# EAGLE board SparkFun_MicroMod_Function_ADIN1110-Panel_v12 (EAGLE 9.6.2), part 1 of 3
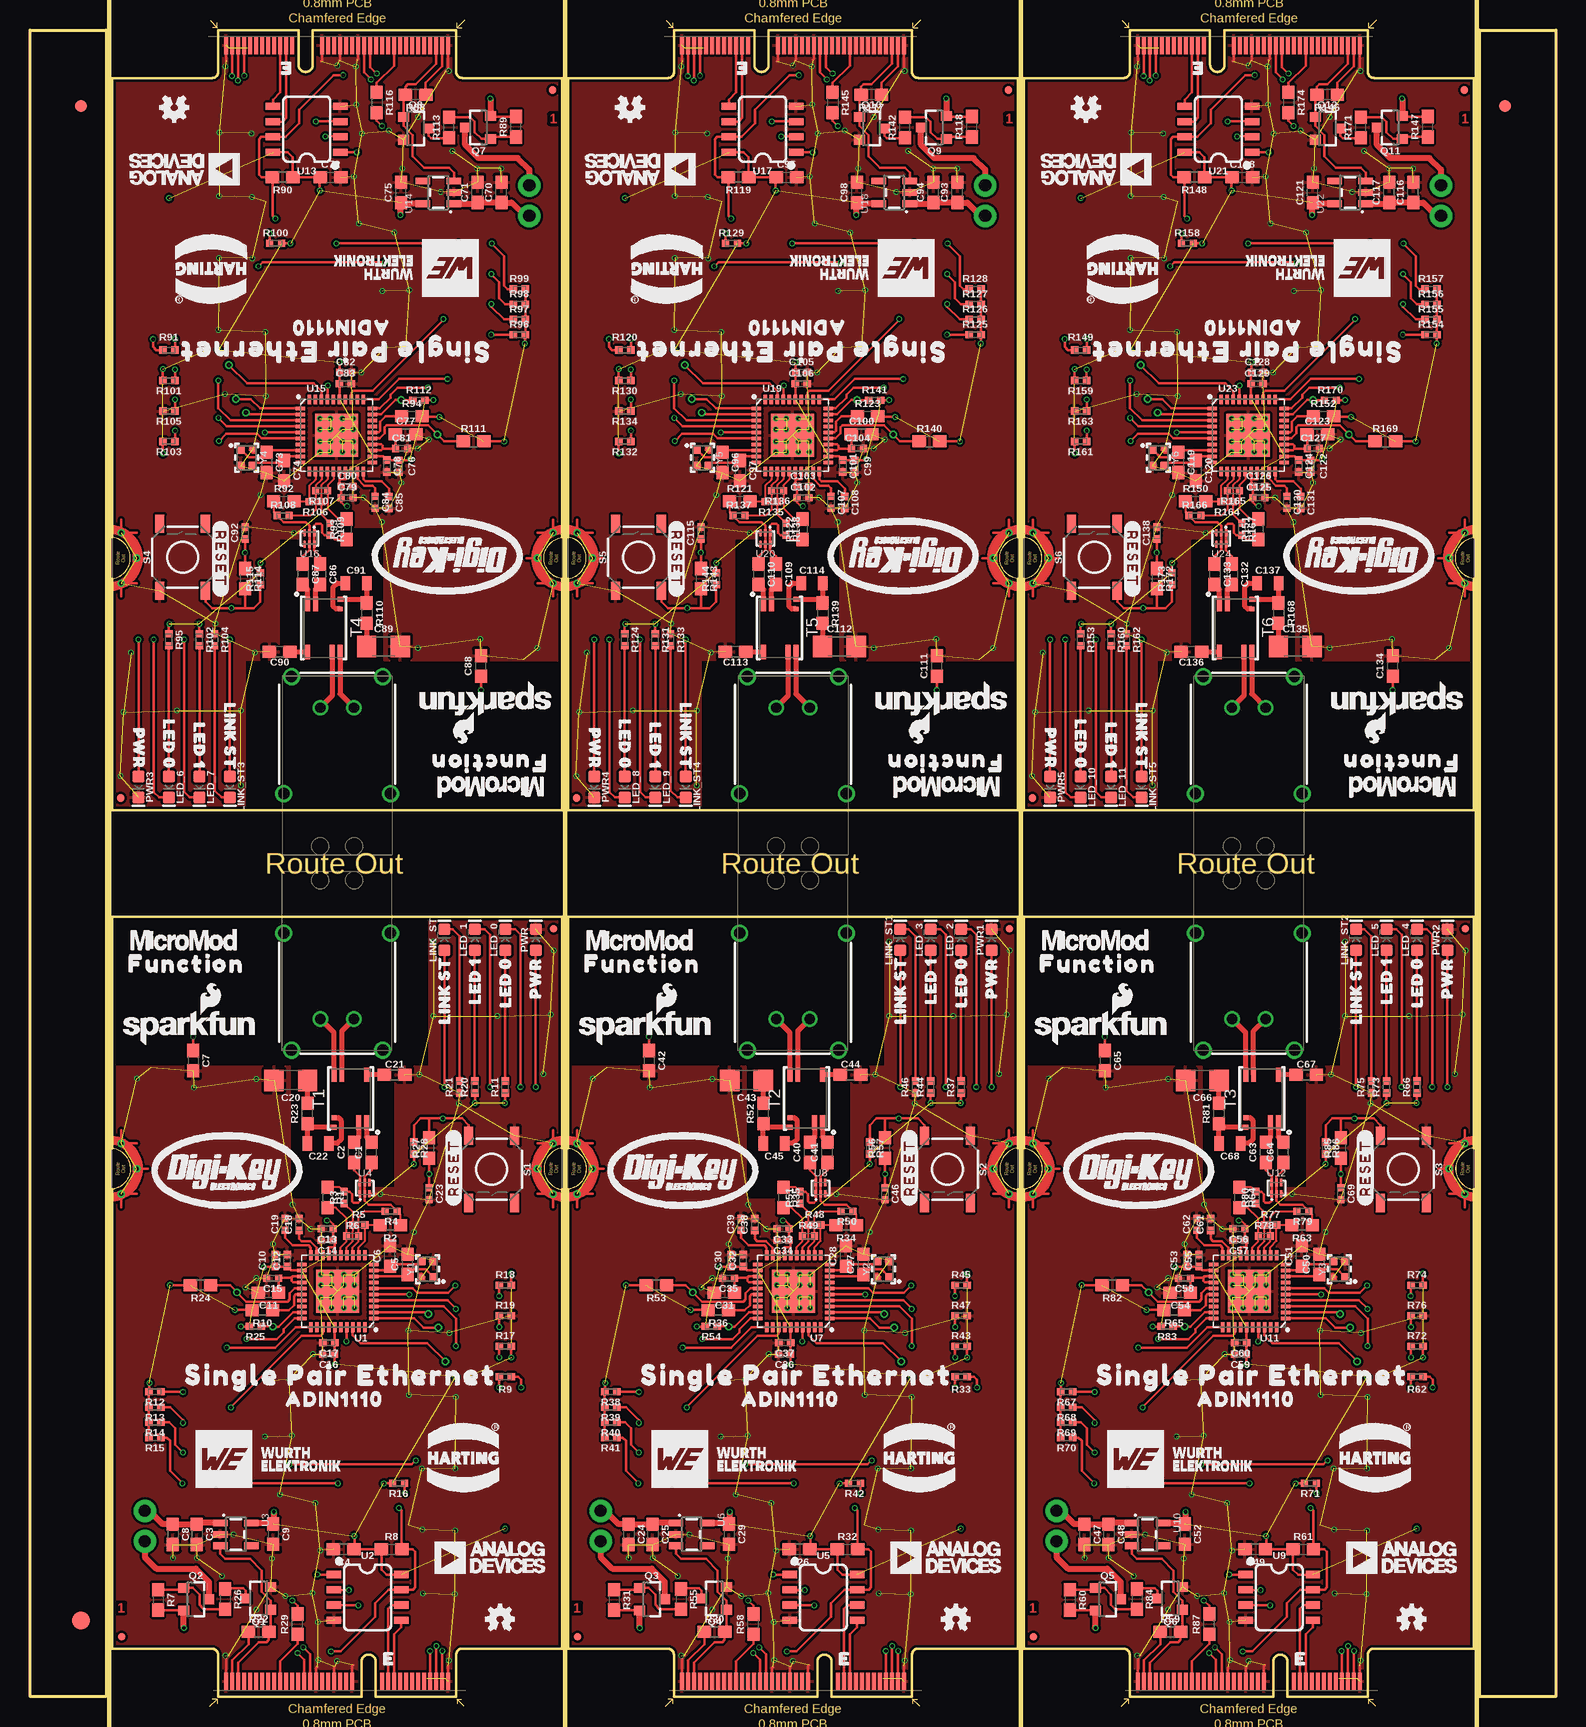
[diagram p0: board, top side]
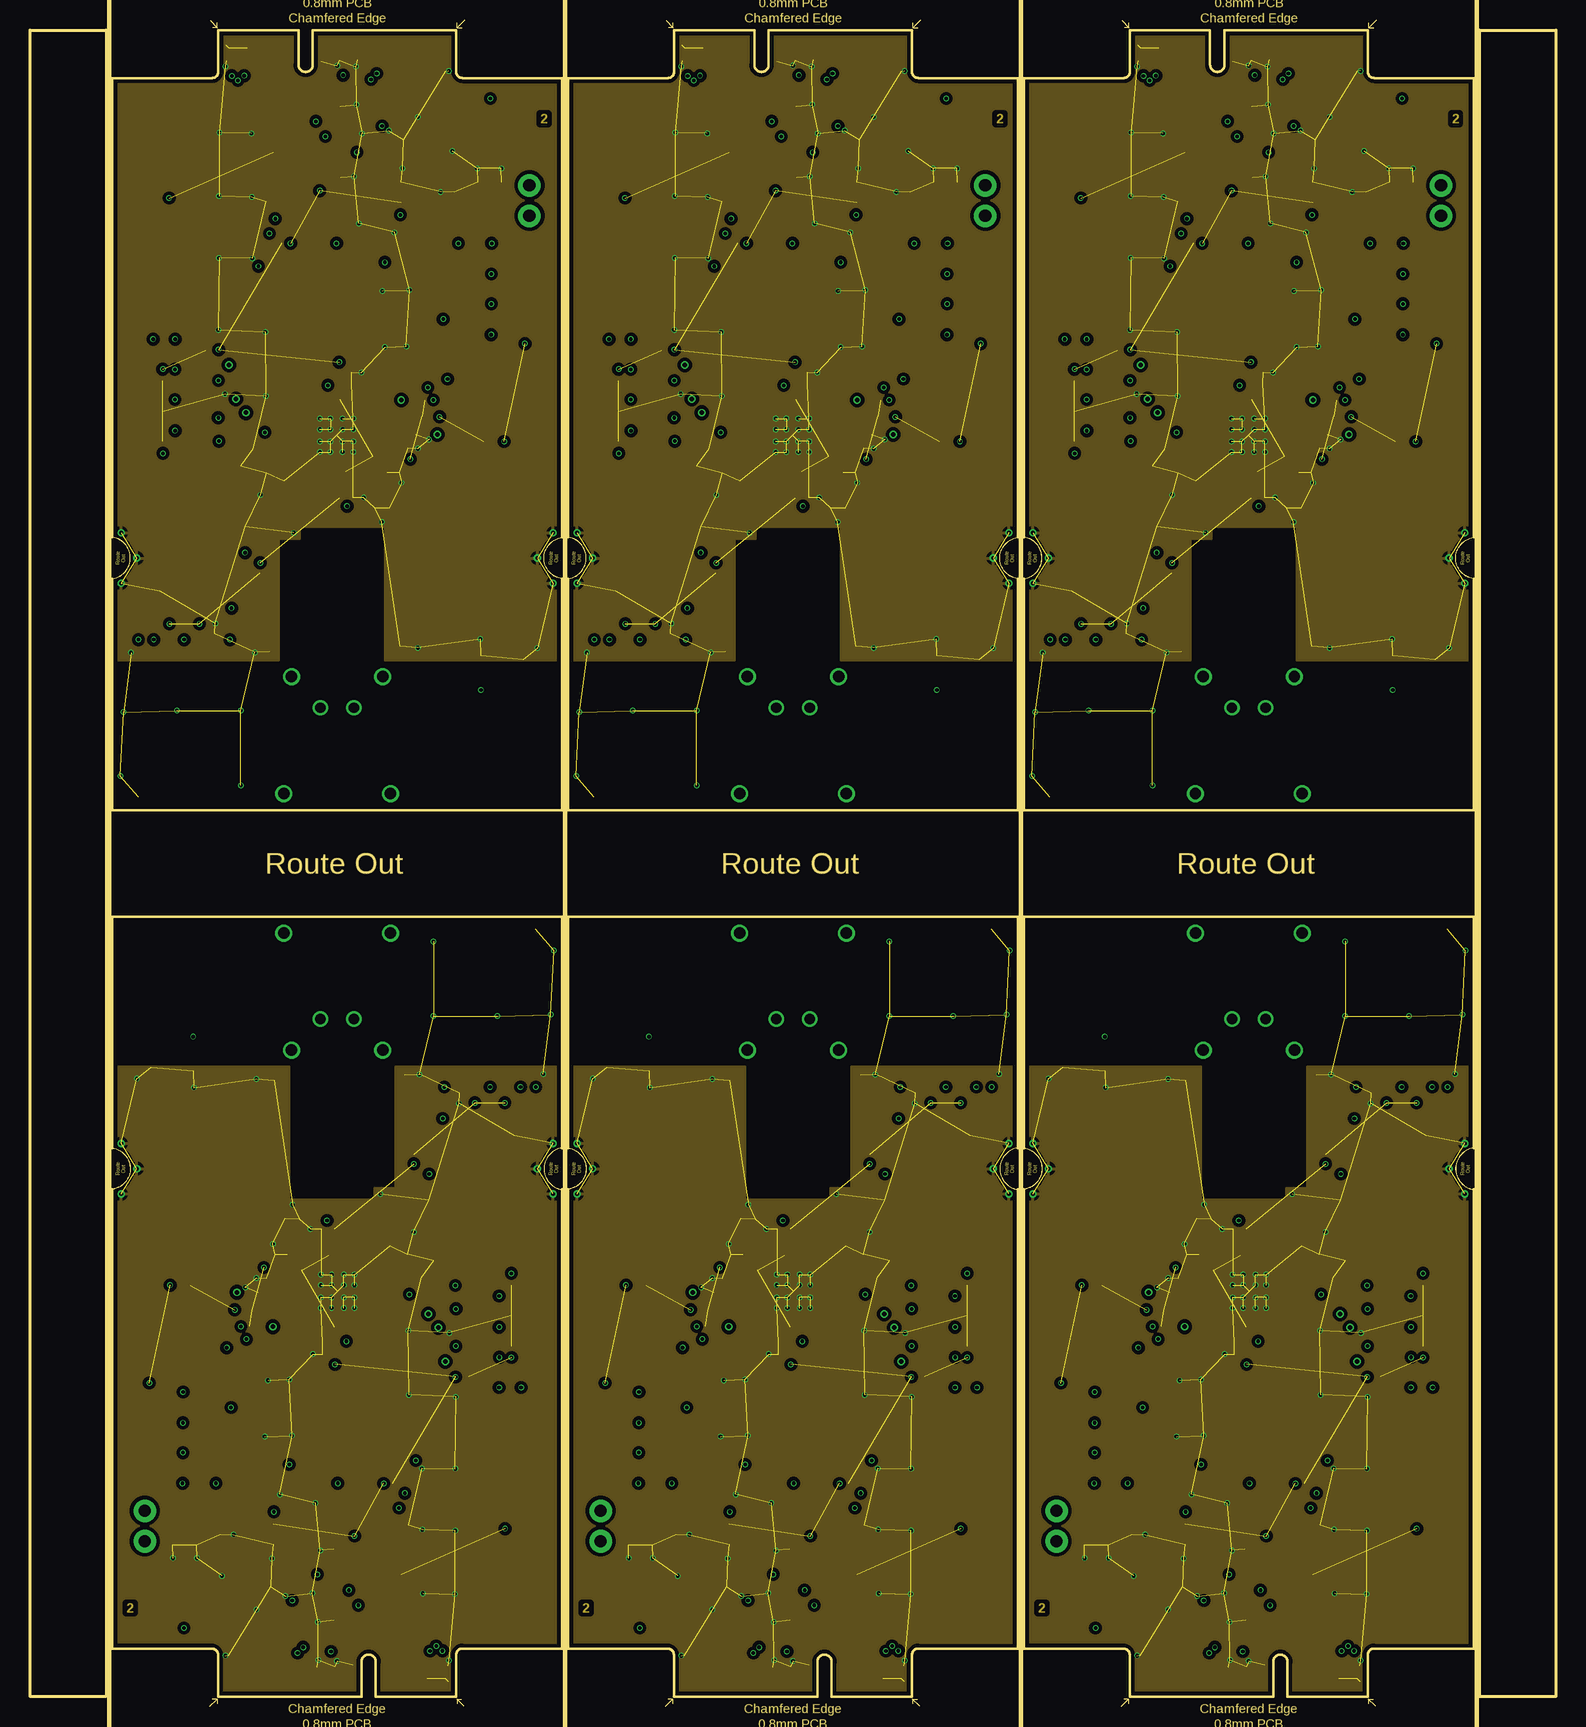
[diagram p1: board, inner layer Route2]
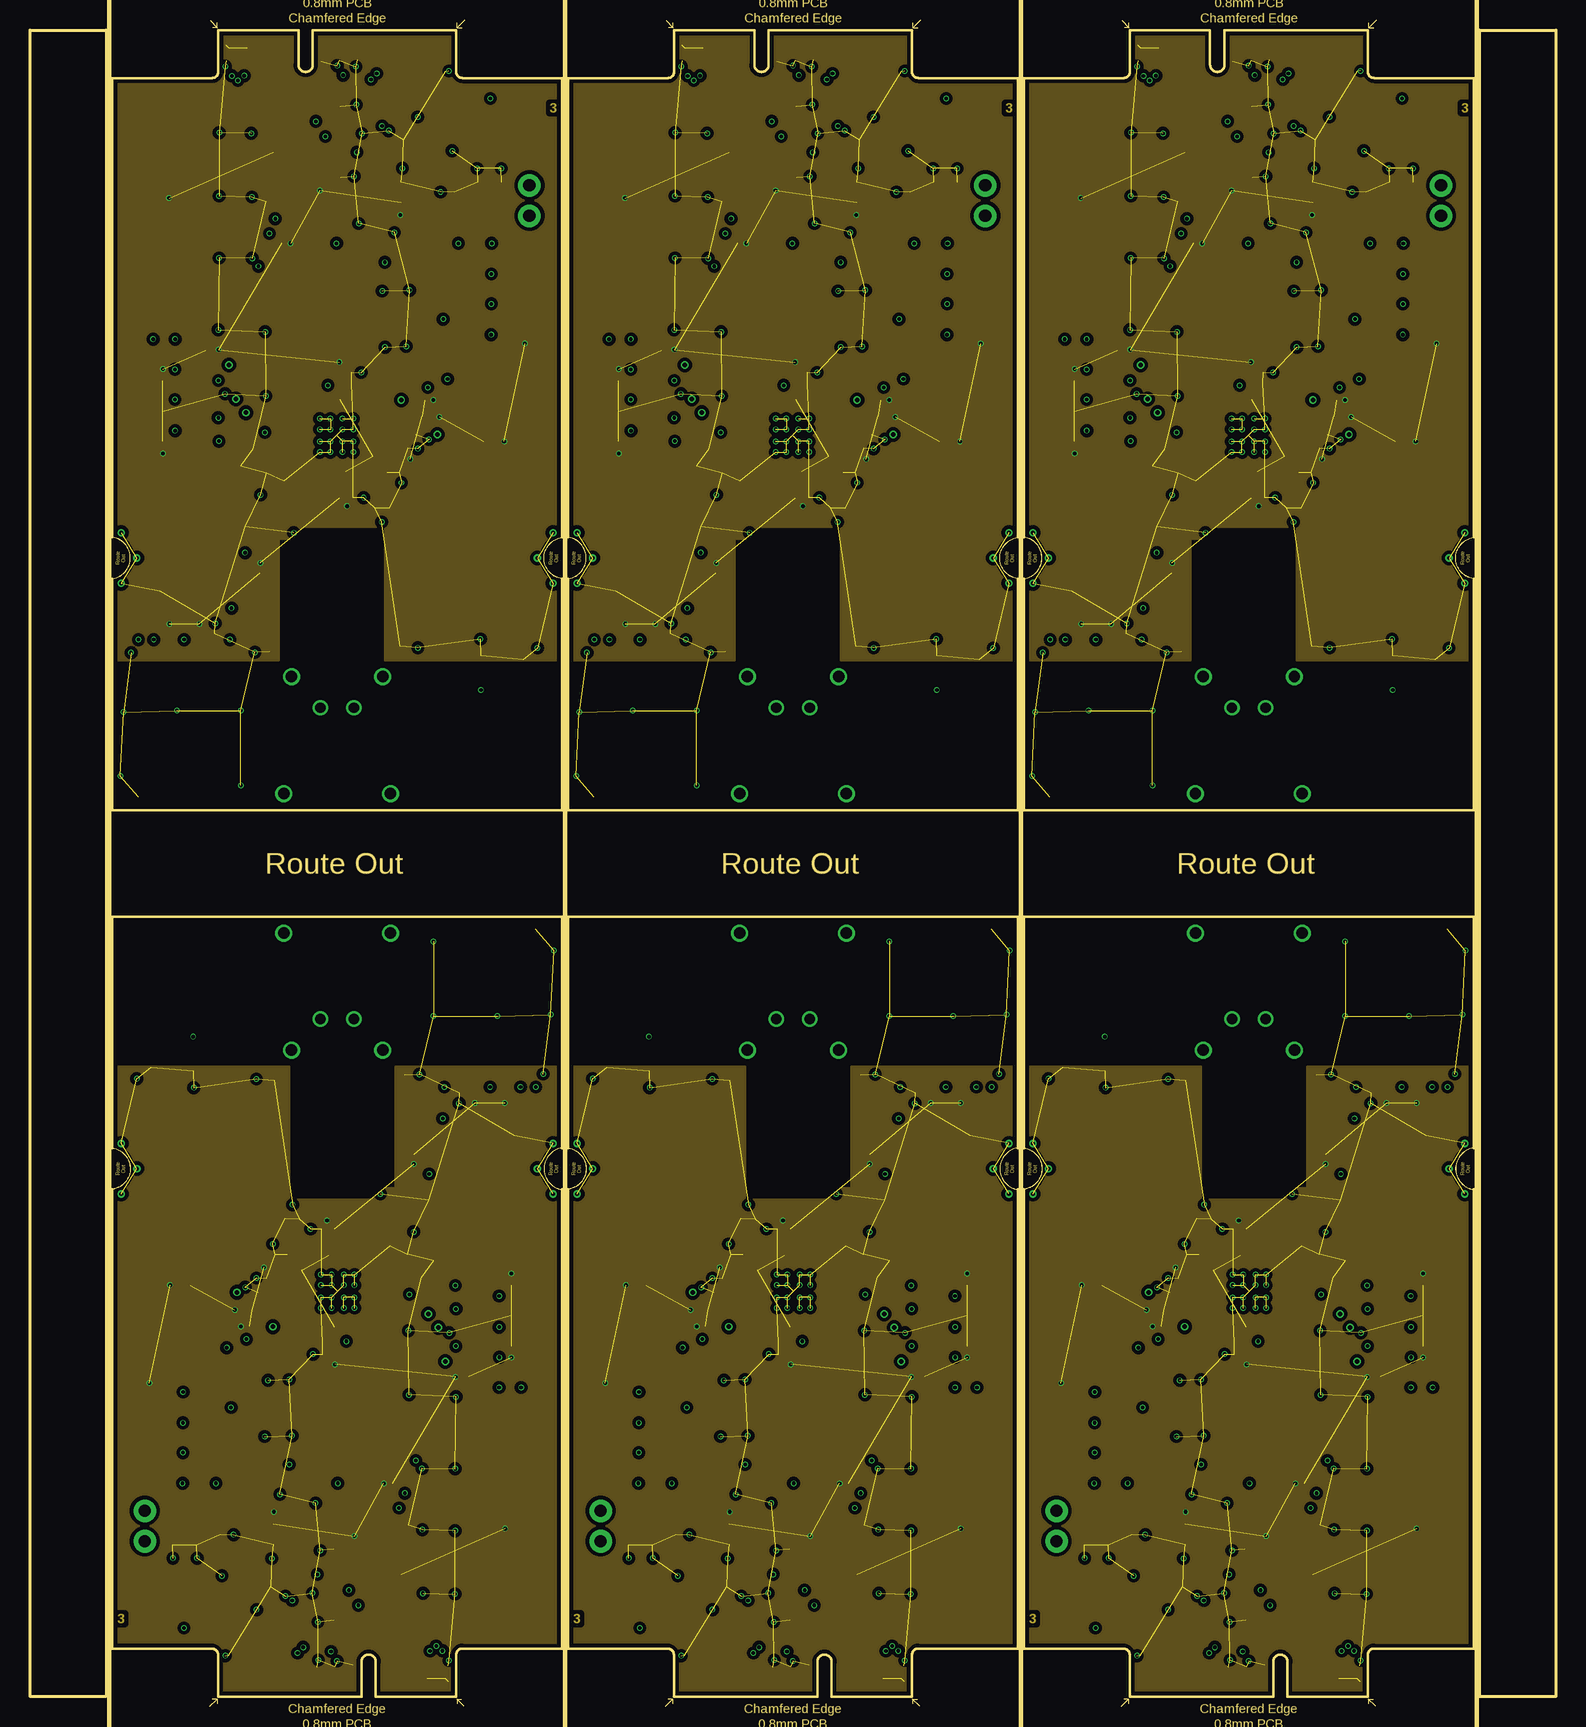
[diagram p2: board, inner layer Route15]
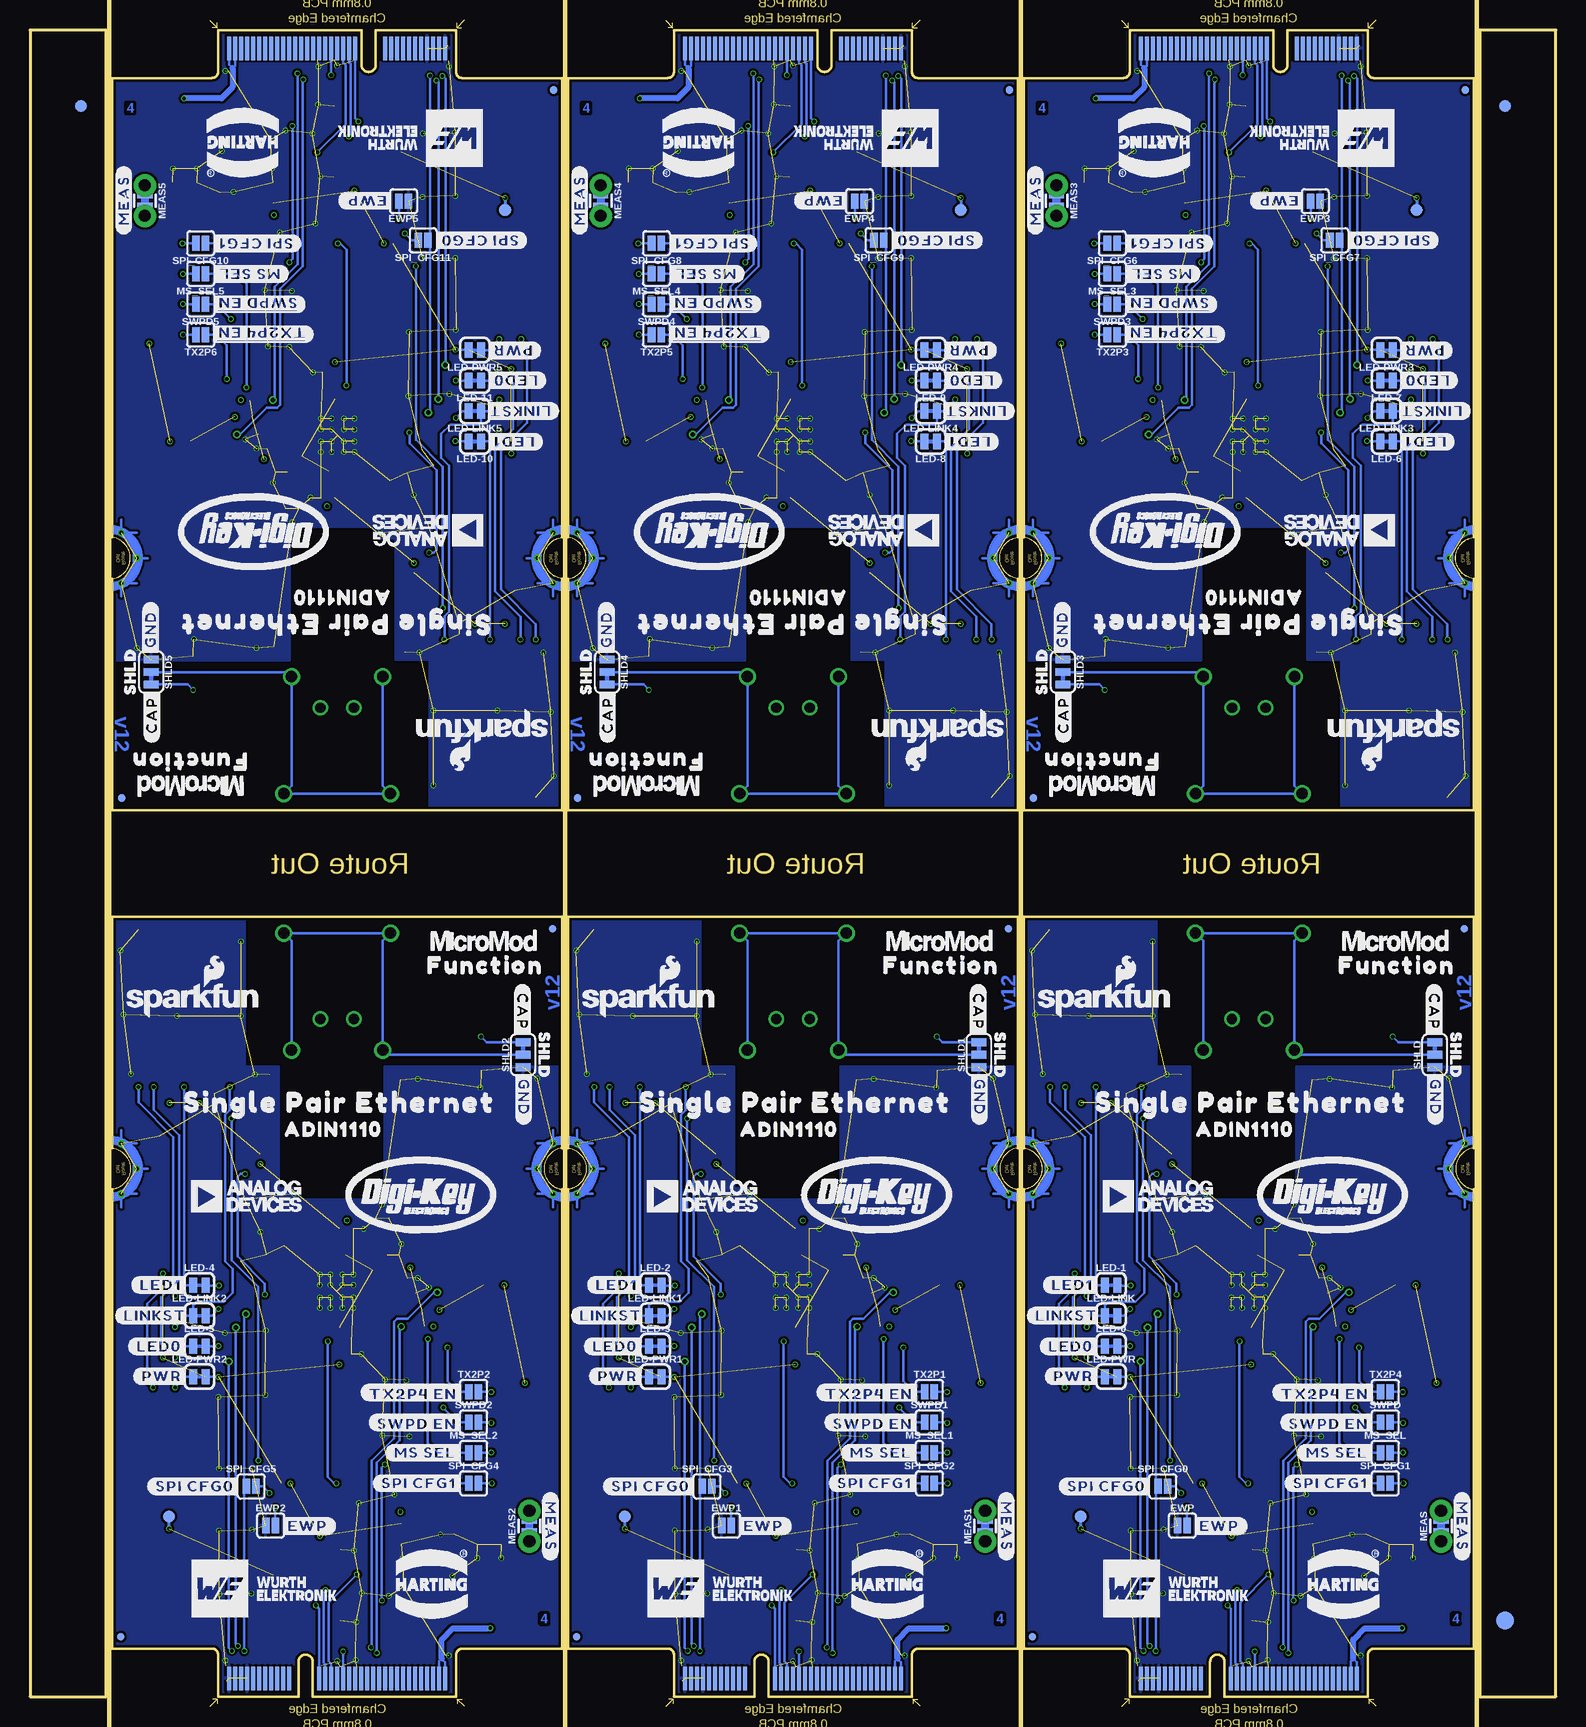
[diagram p3: board, bottom side, seen from below]

Size 127.2 x 138.89 mm. Coordinates in mm from the lower left corner, seen from the top.
Outline: 35.53,0 28.83,0 28.83,2.9 arc180 27.63,2.9 27.63,0 15.68,0 15.68,3.5 arc90 15.15,4 6.86,4 6.86,42.29 arc165 6.86,45.72 6.86,65 44.35,65 44.35,45.72 arc165 44.35,42.27 44.35,4 36,4 arc90 35.53,3.5 35.53,0
Outline: 73.53,0 66.83,0 66.83,2.9 arc180 65.63,2.9 65.63,0 53.68,0 53.68,3.5 arc90 53.15,4 44.86,4 44.86,42.29 arc165 44.86,45.72 44.86,65 82.35,65 82.35,45.72 arc165 82.35,42.27 82.35,4 74,4 arc90 73.53,3.5 73.53,0
Outline: 111.53,0 104.83,0 104.83,2.9 arc180 103.63,2.9 103.63,0 91.68,0 91.68,3.5 arc90 91.15,4 82.86,4 82.86,42.29 arc165 82.86,45.72 82.86,65 120.34,65 120.34,45.72 arc165 120.34,42.27 120.34,4 112,4 arc90 111.53,3.5 111.53,0
Outline: 15.68,138.89 22.38,138.89 22.38,135.99 arc180 23.58,135.99 23.58,138.89 35.53,138.89 35.53,135.39 arc90 36.05,134.89 44.35,134.89 44.35,96.6 arc165 44.35,93.17 44.35,73.89 6.86,73.89 6.86,93.17 arc165 6.86,96.62 6.86,134.89 15.2,134.89 arc90 15.68,135.39 15.68,138.89
Outline: 53.68,138.89 60.38,138.89 60.38,135.99 arc180 61.58,135.99 61.58,138.89 73.53,138.89 73.53,135.39 arc90 74.05,134.89 82.35,134.89 82.35,96.6 arc165 82.35,93.17 82.35,73.89 44.86,73.89 44.86,93.17 arc165 44.86,96.62 44.86,134.89 53.2,134.89 arc90 53.68,135.39 53.68,138.89
Outline: 91.67,138.89 98.37,138.89 98.37,135.99 arc180 99.57,135.99 99.57,138.89 111.52,138.89 111.52,135.39 arc90 112.05,134.89 120.34,134.89 120.34,96.6 arc165 120.34,93.17 120.34,73.89 82.86,73.89 82.86,93.17 arc165 82.86,96.62 82.86,134.89 91.2,134.89 arc90 91.67,135.39 91.67,138.89
Outline: 120.85,138.89 127.2,138.89 127.2,0 120.85,0 120.85,138.89
Outline: 0,138.89 6.35,138.89 6.35,0 0,0 0,138.89
Copper layers (1+2*15+16): Top 0.035mm / dielectric 1.5mm / Route2 0.035mm / dielectric 0.15mm / Route15 0.035mm / dielectric 0.2mm / Bottom 0.035mm
Design rules "SparkFun_MicroMod_Function_ADIN1110": minimum track width 4mil, minimum drill 0.2mm, track to track 4mil, track to pad 4mil, pad to pad 4mil, via to via 4mil, smd to smd 4mil, copper to edge 6mil, drill to drill 6mil, minimum pad ring 3mil, minimum via ring 3mil, stop-mask expansion 2.5mil, vias tented up to drill 25mil, thermal gap 10mil
Net classes: 0 default: width 0 mm, drill 0 mm
Milling: 4 lines

## Footprints (pad centres in the part's own frame; a part is rotated, then mirrored left to right if it is on the bottom)
0603 = smd 1.1 x 1: 1 -0.85,0; 2 0.85,0
0402-TIGHT = smd 0.6 x 0.6: 1 -0.5,0; 2 0.5,0
1206 = smd 1.6 x 1.8: 1 -1.4,0; 2 1.4,0
0805 = smd 0.8 x 1.2: 1 -0.9,0; 2 0.9,0
TP_15TH = drill 0.381 pad 0.61: 1 0,0
FIDUCIAL-1X2 = smd 1 x 1: 1 0,0
FIDUCIAL-1.5X3 = smd 1.5 x 1.5: 1 0,0
SMT-JUMPER_2_NO_SILK = smd 0.635 x 1.27: 1 -0.406,0; 2 0.406,0
FIDUCIAL-MICRO = smd 0.635 x 0.635: 1 0,0
T1_INDUSTRIAL_JACK_AH_IP20 = drill 0.85 pad 1.25: 1 1.4,8.52; 2 -1.4,8.52 | drill 0.95 pad 1.35: S1 -3.8,11.12; S2 3.8,11.12; S3 4.45,1.37; S4 -4.45,1.37
M.2-CARD-E-22_FUNCTION_STANDARD = smd 0.35 x 1.45: 1 9.25,1.275; 3 8.75,1.275; 5 8.25,1.275; 7 7.75,1.275; 9 7.25,1.275; 11 6.75,1.275; 13 6.25,1.275; 15 5.75,1.275; 17 5.25,1.275; 19 4.75,1.275; 21 4.25,1.275; 23 3.75,1.275; 33 1.25,1.275; 35 0.75,1.275; 37 0.25,1.275; 39 -0.25,1.275; 41 -0.75,1.275; 43 -1.25,1.275; 45 -1.75,1.275; 47 -2.25,1.275; 49 -2.75,1.275; 51 -3.25,1.275; 53 -3.75,1.275; 55 -4.25,1.275; 57 -4.75,1.275; 59 -5.25,1.275; 61 -5.75,1.275; 63 -6.25,1.275; 65 -6.75,1.275; 67 -7.25,1.275; 69 -7.75,1.275; 71 -8.25,1.275; 73 -8.75,1.275; 75 -9.25,1.275 | smd 0.35 x 1.95 bottom: 2 9,1.525; 4 8.5,1.525; 6 8,1.525; 8 7.5,1.525; 10 7,1.525; 12 6.5,1.525; 14 6,1.525; 16 5.5,1.525; 18 5,1.525; 20 4.5,1.525; 22 4,1.525; 32 1.5,1.525; 34 1,1.525; 36 0.5,1.525; 38 0,1.525; 40 -0.5,1.525; 42 -1,1.525; 44 -1.5,1.525; 46 -2,1.525; 48 -2.5,1.525; 50 -3,1.525; 52 -3.5,1.525; 54 -4,1.525; 56 -4.5,1.525; 58 -5,1.525; 60 -5.5,1.525; 62 -6,1.525; 64 -6.5,1.525; 66 -7,1.525; 68 -7.5,1.525; 70 -8,1.525; 72 -8.5,1.525; 74 -9,1.525 | drill 0.305 pad 0.61: GND1 -18,41.9; GND2 -16.7,44; GND3 -18,46.1; GND4 18,41.9; GND5 16.7,44; GND6 18,46.1
SMT-JUMPER_2_NC_TRACE_SILK = smd 0.66 x 1.27: 1 -0.521,0; 2 0.521,0
LED-0603 = smd 1 x 1: A -0.877,0; C 0.877,0
COMBO-JUMPER_2_NC_TRACE = smd 0.635 x 1.27: 1 -0.508,0; 2 0.508,0 | drill 1.016 pad 1.88: 3 -1.27,0; 4 1.27,0
SOT23-3 = smd 0.8 x 0.9: 1 -0.95,-1; 2 0.95,-1; 3 0,1.1
TACTILE_SWITCH_SMD_5.2MM = smd 1.524 x 0.762: 1 -2.794,1.905; 2 2.794,1.905; 3 -2.794,-1.905; 4 2.794,-1.905
SMT-JUMPER_3_1-NC_TRACE_SILK = smd 0.66 x 1.27: 1 -1.041,0; 2 0,0; 3 1.041,0
WE_STST_TRANSFORMER_1:1_SMD_3.2X4.7MM_74930030 = smd 1.2 x 0.41: 1 -1.99,-1.35; 2 -1.99,-0.7; 5 1.99,-1.35; 6 1.99,0.7; 7 1.99,1.35 | smd 0.4 x 0.41: 3 -2.39,1.35; 4 -1.59,1.35
PAD.03X.04 = smd 1.016 x 1.016: 1 0,0
LFCSP-40 = smd 0.8 x 0.285: 1 -3,2.25; 2 -3,1.75; 3 -3,1.25; 4 -3,0.75; 5 -3,0.25; 6 -3,-0.25; 7 -3,-0.75; 8 -3,-1.25; 9 -3,-1.75; 10 -3,-2.25; 21 3,-2.25; 22 3,-1.75; 23 3,-1.25; 24 3,-0.75; 25 3,-0.25; 26 3,0.25; 27 3,0.75; 28 3,1.25; 29 3,1.75; 30 3,2.25 | smd 0.285 x 0.8: 11 -2.25,-3; 12 -1.75,-3; 13 -1.25,-3; 14 -0.75,-3; 15 -0.25,-3; 16 0.25,-3; 17 0.75,-3; 18 1.25,-3; 19 1.75,-3; 20 2.25,-3; 31 2.25,3; 32 1.75,3; 33 1.25,3; 34 0.75,3; 35 0.25,3; 36 -0.25,3; 37 -0.75,3; 38 -1.25,3; 39 -1.75,3; 40 -2.25,3 | smd 3.6 x 3.6: EP 0,0
SO08 = smd 0.6 x 1.2: 1 -1.905,-2.8; 2 -0.635,-2.8; 3 0.635,-2.8; 4 1.905,-2.8; 5 1.905,2.8; 6 0.635,2.8; 7 -0.635,2.8; 8 -1.905,2.8
SOT23-5 = smd 0.55 x 1.2: 1 -0.95,-1.3; 2 0,-1.3; 3 0.95,-1.3; 4 0.95,1.3; 5 -0.95,1.3
WE_TVS_1.0X1.2MM = smd 0.2 x 0.6: 1 -0.4,-0.475; 2 0,-0.475; 3 0.4,-0.475; 4 0.4,0.475; 5 0,0.475; 6 -0.4,0.475
CRYSTAL-SMD-2.0X1.6MM-WE = smd 0.75 x 0.7: 1 -0.675,-0.5; 2 0.675,-0.5; 3 0.675,0.5 | smd 0.381 x 0.381: 4 -0.675,0.5

## Placement (x,y rotation side)
C1  0.22uF  [0603]  28.47,45.36 90 top
C2  0.22uF  [0603]  27.01,45.36 90 top
C3  0.1uF  [0603]  13.9,13.53 270 top
C4  0.1uF  [0603]  26.14,12.27 180 top
C5  10pF  [0603]  31.48,36.03 90 top
C6  10pF  [0603]  30.01,36.72 90 top
C7  3.3nF  [0603]  13.6,53 270 top
C8  1.0uF  [0603]  11.9,13.53 270 top
C9  1.0uF  [0603]  20.27,13.54 270 top
C10  0.1uF  [0402-TIGHT]  20.44,36.35 90 top
C11  0.68uF  [0603]  19.89,33.67 180 top
C12  10nF  [0402-TIGHT]  21.45,36.34 90 top
C13  0.1uF  [0402-TIGHT]  24.77,38.99 180 top
C14  10nF  [0402-TIGHT]  24.78,38.03 180 top
C15  0.1uF  [0402-TIGHT]  20.23,34.87 180 top
C16  0.1uF  [0402-TIGHT]  24.9,28.53 180 top
C17  10nF  [0402-TIGHT]  24.91,29.49 180 top
C18  0.1uF  [0402-TIGHT]  22.43,39.35 90 top
C19  1.0uF  [0402-TIGHT]  21.28,39.37 90 top
C20  1.0nF/2kV  [1206]  21.73,51.36 180 top
C21  0.1uF/50V  [0603]  30.39,51.82 0 top
C22  470nF/100V  [0805]  24.03,46.1 180 top
C23  0.1uF  [0402-TIGHT]  33.27,41.91 270 top
C24  1.0uF  [0603]  49.9,13.53 270 top
C25  0.1uF  [0603]  51.9,13.53 270 top
C26  0.1uF  [0603]  64.14,12.27 180 top
C27  10pF  [0603]  69.48,36.03 90 top
C28  10pF  [0603]  68.01,36.72 90 top
C29  1.0uF  [0603]  58.27,13.54 270 top
C30  0.1uF  [0402-TIGHT]  58.44,36.35 90 top
C31  0.68uF  [0603]  57.89,33.67 180 top
C32  10nF  [0402-TIGHT]  59.45,36.34 90 top
C33  0.1uF  [0402-TIGHT]  62.76,38.99 180 top
C34  10nF  [0402-TIGHT]  62.77,38.03 180 top
C35  0.1uF  [0402-TIGHT]  58.23,34.87 180 top
C36  0.1uF  [0402-TIGHT]  62.9,28.53 180 top
C37  10nF  [0402-TIGHT]  62.91,29.49 180 top
C38  0.1uF  [0402-TIGHT]  60.42,39.35 90 top
C39  1.0uF  [0402-TIGHT]  59.28,39.37 90 top
C40  0.22uF  [0603]  65.01,45.36 90 top
C41  0.22uF  [0603]  66.46,45.36 90 top
C42  3.3nF  [0603]  51.6,53 270 top
C43  1.0nF/2kV  [1206]  59.73,51.36 180 top
C44  0.1uF/50V  [0603]  68.39,51.82 0 top
C45  470nF/100V  [0805]  62.02,46.1 180 top
C46  0.1uF  [0402-TIGHT]  71.27,41.91 270 top
C47  1.0uF  [0603]  87.9,13.53 270 top
C48  0.1uF  [0603]  89.9,13.53 270 top
C49  0.1uF  [0603]  102.14,12.27 180 top
C50  10pF  [0603]  107.48,36.03 90 top
C51  10pF  [0603]  106.01,36.72 90 top
C52  1.0uF  [0603]  96.27,13.54 270 top
C53  0.1uF  [0402-TIGHT]  96.43,36.35 90 top
C54  0.68uF  [0603]  95.89,33.67 180 top
C55  10nF  [0402-TIGHT]  97.45,36.34 90 top
C56  0.1uF  [0402-TIGHT]  100.76,38.99 180 top
C57  10nF  [0402-TIGHT]  100.77,38.03 180 top
C58  0.1uF  [0402-TIGHT]  96.23,34.87 180 top
C59  0.1uF  [0402-TIGHT]  100.89,28.53 180 top
C60  10nF  [0402-TIGHT]  100.91,29.49 180 top
C61  0.1uF  [0402-TIGHT]  98.42,39.35 90 top
C62  1.0uF  [0402-TIGHT]  97.28,39.37 90 top
C63  0.22uF  [0603]  103,45.36 90 top
C64  0.22uF  [0603]  104.46,45.36 90 top
C65  3.3nF  [0603]  89.6,53 270 top
C66  1.0nF/2kV  [1206]  97.73,51.36 180 top
C67  0.1uF/50V  [0603]  106.39,51.82 0 top
C68  470nF/100V  [0805]  100.02,46.1 180 top
C69  0.1uF  [0402-TIGHT]  109.27,41.91 270 top
C70  1.0uF  [0603]  39.3,125.36 90 top
C71  0.1uF  [0603]  37.3,125.36 90 top
C72  0.1uF  [0603]  25.06,126.62 0 top
C73  10pF  [0603]  19.73,102.86 270 top
C74  10pF  [0603]  21.2,102.17 270 top
C75  1.0uF  [0603]  30.93,125.35 90 top
C76  0.1uF  [0402-TIGHT]  30.77,102.54 270 top
C77  0.68uF  [0603]  31.32,105.22 0 top
C78  10nF  [0402-TIGHT]  29.75,102.55 270 top
C79  0.1uF  [0402-TIGHT]  26.44,99.9 0 top
C80  10nF  [0402-TIGHT]  26.43,100.86 0 top
C81  0.1uF  [0402-TIGHT]  30.97,104.02 0 top
C82  0.1uF  [0402-TIGHT]  26.31,110.36 0 top
C83  10nF  [0402-TIGHT]  26.29,109.4 0 top
C84  0.1uF  [0402-TIGHT]  28.78,99.54 270 top
C85  1.0uF  [0402-TIGHT]  29.92,99.52 270 top
C86  0.22uF  [0603]  24.2,93.53 270 top
C87  0.22uF  [0603]  22.74,93.53 270 top
C88  3.3nF  [0603]  37.6,85.89 90 top
C89  1.0nF/2kV  [1206]  29.47,87.53 0 top
C90  0.1uF/50V  [0603]  20.81,87.07 180 top
C91  470nF/100V  [0805]  27.18,92.79 0 top
C92  0.1uF  [0402-TIGHT]  17.93,96.98 90 top
C93  1.0uF  [0603]  77.3,125.36 90 top
C94  0.1uF  [0603]  75.3,125.36 90 top
C95  0.1uF  [0603]  63.06,126.62 0 top
C96  10pF  [0603]  57.73,102.86 270 top
C97  10pF  [0603]  59.19,102.17 270 top
C98  1.0uF  [0603]  68.93,125.35 90 top
C99  0.1uF  [0402-TIGHT]  68.77,102.54 270 top
C100  0.68uF  [0603]  69.31,105.22 0 top
C101  10nF  [0402-TIGHT]  67.75,102.55 270 top
C102  0.1uF  [0402-TIGHT]  64.44,99.9 0 top
C103  10nF  [0402-TIGHT]  64.43,100.86 0 top
C104  0.1uF  [0402-TIGHT]  68.97,104.02 0 top
C105  0.1uF  [0402-TIGHT]  64.31,110.36 0 top
C106  10nF  [0402-TIGHT]  64.29,109.4 0 top
C107  0.1uF  [0402-TIGHT]  66.78,99.54 270 top
C108  1.0uF  [0402-TIGHT]  67.92,99.52 270 top
C109  0.22uF  [0603]  62.2,93.53 270 top
C110  0.22uF  [0603]  60.74,93.53 270 top
C111  3.3nF  [0603]  75.6,85.89 90 top
C112  1.0nF/2kV  [1206]  67.47,87.53 0 top
C113  0.1uF/50V  [0603]  58.81,87.07 180 top
C114  470nF/100V  [0805]  65.18,92.79 0 top
C115  0.1uF  [0402-TIGHT]  55.93,96.98 90 top
C116  1.0uF  [0603]  115.3,125.36 90 top
C117  0.1uF  [0603]  113.3,125.36 90 top
C118  0.1uF  [0603]  101.06,126.62 0 top
C119  10pF  [0603]  95.72,102.86 270 top
C120  10pF  [0603]  97.19,102.17 270 top
C121  1.0uF  [0603]  106.93,125.35 90 top
C122  0.1uF  [0402-TIGHT]  106.77,102.54 270 top
C123  0.68uF  [0603]  107.31,105.22 0 top
C124  10nF  [0402-TIGHT]  105.75,102.55 270 top
C125  0.1uF  [0402-TIGHT]  102.44,99.9 0 top
C126  10nF  [0402-TIGHT]  102.43,100.86 0 top
C127  0.1uF  [0402-TIGHT]  106.97,104.02 0 top
C128  0.1uF  [0402-TIGHT]  102.31,110.36 0 top
C129  10nF  [0402-TIGHT]  102.29,109.4 0 top
C130  0.1uF  [0402-TIGHT]  104.78,99.54 270 top
C131  1.0uF  [0402-TIGHT]  105.92,99.52 270 top
C132  0.22uF  [0603]  100.2,93.53 270 top
C133  0.22uF  [0603]  98.74,93.53 270 top
C134  3.3nF  [0603]  113.6,85.89 90 top
C135  1.0nF/2kV  [1206]  105.47,87.53 0 top
C136  0.1uF/50V  [0603]  96.81,87.07 180 top
C137  470nF/100V  [0805]  103.18,92.79 0 top
C138  0.1uF  [0402-TIGHT]  93.93,96.98 90 top
CIPO  TEST-POINTTP_15TH_THRU  [TP_15TH]  33.2,31.89 0 top
CIPO1  TEST-POINTTP_15TH_THRU  [TP_15TH]  71.2,31.89 0 top
CIPO2  TEST-POINTTP_15TH_THRU  [TP_15TH]  109.2,31.89 0 top
CIPO3  TEST-POINTTP_15TH_THRU  [TP_15TH]  18.01,107 180 top
CIPO4  TEST-POINTTP_15TH_THRU  [TP_15TH]  56,107 180 top
CIPO5  TEST-POINTTP_15TH_THRU  [TP_15TH]  94,107 180 top
COPI  TEST-POINTTP_15TH_THRU  [TP_15TH]  34.04,30.76 0 top
COPI1  TEST-POINTTP_15TH_THRU  [TP_15TH]  72.04,30.76 0 top
COPI2  TEST-POINTTP_15TH_THRU  [TP_15TH]  110.04,30.76 0 top
COPI3  TEST-POINTTP_15TH_THRU  [TP_15TH]  17.17,108.13 180 top
COPI4  TEST-POINTTP_15TH_THRU  [TP_15TH]  55.16,108.13 180 top
COPI5  TEST-POINTTP_15TH_THRU  [TP_15TH]  93.16,108.13 180 top
CS  TEST-POINTTP_15TH_THRU  [TP_15TH]  20.26,30.83 0 top
CS1  TEST-POINTTP_15TH_THRU  [TP_15TH]  58.26,30.83 0 top
CS2  TEST-POINTTP_15TH_THRU  [TP_15TH]  96.26,30.83 0 top
CS3  TEST-POINTTP_15TH_THRU  [TP_15TH]  30.94,108.06 180 top
CS4  TEST-POINTTP_15TH_THRU  [TP_15TH]  68.94,108.06 180 top
CS5  TEST-POINTTP_15TH_THRU  [TP_15TH]  106.94,108.06 180 top
E$1  [FIDUCIAL-1X2]  4.23,132.54 0 top
E$2  [FIDUCIAL-1X2]  4.23,132.54 0 bottom
E$3  [FIDUCIAL-1X2]  122.97,132.54 0 top
E$4  [FIDUCIAL-1X2]  122.97,132.54 0 bottom
E$5  [FIDUCIAL-1.5X3]  4.23,6.35 0 top
E$6  [FIDUCIAL-1.5X3]  4.23,6.35 0 bottom
EWP  JUMPER-SMT_2_NO_SILK  [SMT-JUMPER_2_NO_SILK]  31.14,14.27 0 bottom
EWP1  JUMPER-SMT_2_NO_SILK  [SMT-JUMPER_2_NO_SILK]  69.14,14.27 0 bottom
EWP2  JUMPER-SMT_2_NO_SILK  [SMT-JUMPER_2_NO_SILK]  107.14,14.27 0 bottom
EWP3  JUMPER-SMT_2_NO_SILK  [SMT-JUMPER_2_NO_SILK]  20.06,124.62 180 bottom
EWP4  JUMPER-SMT_2_NO_SILK  [SMT-JUMPER_2_NO_SILK]  58.06,124.62 180 bottom
EWP5  JUMPER-SMT_2_NO_SILK  [SMT-JUMPER_2_NO_SILK]  96.06,124.62 180 bottom
FD1  FIDUCIALUFIDUCIAL  [FIDUCIAL-MICRO]  7.65,5 90 top
FD2  FIDUCIALUFIDUCIAL  [FIDUCIAL-MICRO]  43.65,64 90 top
FD3  FIDUCIALUFIDUCIAL  [FIDUCIAL-MICRO]  43.65,5 270 bottom
FD4  FIDUCIALUFIDUCIAL  [FIDUCIAL-MICRO]  7.65,64 270 bottom
FD5  FIDUCIALUFIDUCIAL  [FIDUCIAL-MICRO]  45.65,5 90 top
FD6  FIDUCIALUFIDUCIAL  [FIDUCIAL-MICRO]  81.65,64 90 top
FD7  FIDUCIALUFIDUCIAL  [FIDUCIAL-MICRO]  81.65,5 270 bottom
FD8  FIDUCIALUFIDUCIAL  [FIDUCIAL-MICRO]  45.65,64 270 bottom
FD9  FIDUCIALUFIDUCIAL  [FIDUCIAL-MICRO]  83.65,5 90 top
FD10  FIDUCIALUFIDUCIAL  [FIDUCIAL-MICRO]  119.65,64 90 top
FD11  FIDUCIALUFIDUCIAL  [FIDUCIAL-MICRO]  119.65,5 270 bottom
FD12  FIDUCIALUFIDUCIAL  [FIDUCIAL-MICRO]  83.65,64 270 bottom
FD13  FIDUCIALUFIDUCIAL  [FIDUCIAL-MICRO]  43.55,133.89 270 top
FD14  FIDUCIALUFIDUCIAL  [FIDUCIAL-MICRO]  7.55,74.89 270 top
FD15  FIDUCIALUFIDUCIAL  [FIDUCIAL-MICRO]  7.55,133.89 90 bottom
FD16  FIDUCIALUFIDUCIAL  [FIDUCIAL-MICRO]  43.55,74.89 90 bottom
FD17  FIDUCIALUFIDUCIAL  [FIDUCIAL-MICRO]  81.55,133.89 270 top
FD18  FIDUCIALUFIDUCIAL  [FIDUCIAL-MICRO]  45.55,74.89 270 top
FD19  FIDUCIALUFIDUCIAL  [FIDUCIAL-MICRO]  45.55,133.89 90 bottom
FD20  FIDUCIALUFIDUCIAL  [FIDUCIAL-MICRO]  81.55,74.89 90 bottom
FD21  FIDUCIALUFIDUCIAL  [FIDUCIAL-MICRO]  119.55,133.89 270 top
FD22  FIDUCIALUFIDUCIAL  [FIDUCIAL-MICRO]  83.55,74.89 270 top
FD23  FIDUCIALUFIDUCIAL  [FIDUCIAL-MICRO]  83.55,133.89 90 bottom
FD24  FIDUCIALUFIDUCIAL  [FIDUCIAL-MICRO]  119.55,74.89 90 bottom
INT  TEST-POINTTP_15TH_THRU  [TP_15TH]  17.26,33.7 0 top
INT1  TEST-POINTTP_15TH_THRU  [TP_15TH]  55.26,33.7 0 top
INT2  TEST-POINTTP_15TH_THRU  [TP_15TH]  93.26,33.7 0 top
INT3  TEST-POINTTP_15TH_THRU  [TP_15TH]  33.95,105.19 180 top
INT4  TEST-POINTTP_15TH_THRU  [TP_15TH]  71.95,105.19 180 top
INT5  TEST-POINTTP_15TH_THRU  [TP_15TH]  109.94,105.19 180 top
J1  IP20(RJ50)  [T1_INDUSTRIAL_JACK_AH_IP20]  25.6,65 180 top
J2  MICROMOD_FUNCTION_STANDARD  [M.2-CARD-E-22_FUNCTION_STANDARD]  25.6,0 0 top
J3  MICROMOD_FUNCTION_STANDARD  [M.2-CARD-E-22_FUNCTION_STANDARD]  63.6,0 0 top
J4  IP20(RJ50)  [T1_INDUSTRIAL_JACK_AH_IP20]  63.6,65 180 top
J5  MICROMOD_FUNCTION_STANDARD  [M.2-CARD-E-22_FUNCTION_STANDARD]  101.6,0 0 top
J6  IP20(RJ50)  [T1_INDUSTRIAL_JACK_AH_IP20]  101.6,65 180 top
J7  MICROMOD_FUNCTION_STANDARD  [M.2-CARD-E-22_FUNCTION_STANDARD]  25.6,138.89 180 top
J8  IP20(RJ50)  [T1_INDUSTRIAL_JACK_AH_IP20]  25.6,73.89 0 top
J9  MICROMOD_FUNCTION_STANDARD  [M.2-CARD-E-22_FUNCTION_STANDARD]  63.6,138.89 180 top
J10  IP20(RJ50)  [T1_INDUSTRIAL_JACK_AH_IP20]  63.6,73.89 0 top
J11  MICROMOD_FUNCTION_STANDARD  [M.2-CARD-E-22_FUNCTION_STANDARD]  101.6,138.89 180 top
J12  IP20(RJ50)  [T1_INDUSTRIAL_JACK_AH_IP20]  101.6,73.89 0 top
LED-0  JUMPER-SMT_2_NC_TRACE_SILK  [SMT-JUMPER_2_NC_TRACE_SILK]  37.08,29.21 0 bottom
LED-1  JUMPER-SMT_2_NC_TRACE_SILK  [SMT-JUMPER_2_NC_TRACE_SILK]  37.08,34.29 0 bottom
LED-2  JUMPER-SMT_2_NC_TRACE_SILK  [SMT-JUMPER_2_NC_TRACE_SILK]  75.08,34.29 0 bottom
LED-3  JUMPER-SMT_2_NC_TRACE_SILK  [SMT-JUMPER_2_NC_TRACE_SILK]  75.08,29.21 0 bottom
LED-4  JUMPER-SMT_2_NC_TRACE_SILK  [SMT-JUMPER_2_NC_TRACE_SILK]  113.08,34.29 0 bottom
LED-5  JUMPER-SMT_2_NC_TRACE_SILK  [SMT-JUMPER_2_NC_TRACE_SILK]  113.08,29.21 0 bottom
LED-6  JUMPER-SMT_2_NC_TRACE_SILK  [SMT-JUMPER_2_NC_TRACE_SILK]  14.12,104.6 180 bottom
LED-7  JUMPER-SMT_2_NC_TRACE_SILK  [SMT-JUMPER_2_NC_TRACE_SILK]  14.12,109.68 180 bottom
LED-8  JUMPER-SMT_2_NC_TRACE_SILK  [SMT-JUMPER_2_NC_TRACE_SILK]  52.12,104.6 180 bottom
LED-9  JUMPER-SMT_2_NC_TRACE_SILK  [SMT-JUMPER_2_NC_TRACE_SILK]  52.12,109.68 180 bottom
LED-10  JUMPER-SMT_2_NC_TRACE_SILK  [SMT-JUMPER_2_NC_TRACE_SILK]  90.12,104.6 180 bottom
LED-11  JUMPER-SMT_2_NC_TRACE_SILK  [SMT-JUMPER_2_NC_TRACE_SILK]  90.12,109.68 180 bottom
LED-LINK  JUMPER-SMT_2_NC_TRACE_SILK  [SMT-JUMPER_2_NC_TRACE_SILK]  37.08,31.75 0 bottom
LED-LINK1  JUMPER-SMT_2_NC_TRACE_SILK  [SMT-JUMPER_2_NC_TRACE_SILK]  75.08,31.75 0 bottom
LED-LINK2  JUMPER-SMT_2_NC_TRACE_SILK  [SMT-JUMPER_2_NC_TRACE_SILK]  113.08,31.75 0 bottom
LED-LINK3  JUMPER-SMT_2_NC_TRACE_SILK  [SMT-JUMPER_2_NC_TRACE_SILK]  14.12,107.14 180 bottom
LED-LINK4  JUMPER-SMT_2_NC_TRACE_SILK  [SMT-JUMPER_2_NC_TRACE_SILK]  52.12,107.14 180 bottom
LED-LINK5  JUMPER-SMT_2_NC_TRACE_SILK  [SMT-JUMPER_2_NC_TRACE_SILK]  90.12,107.14 180 bottom
LED-PWR  JUMPER-SMT_2_NC_TRACE_SILK  [SMT-JUMPER_2_NC_TRACE_SILK]  37.08,26.67 0 bottom
LED-PWR1  JUMPER-SMT_2_NC_TRACE_SILK  [SMT-JUMPER_2_NC_TRACE_SILK]  75.08,26.67 0 bottom
LED-PWR2  JUMPER-SMT_2_NC_TRACE_SILK  [SMT-JUMPER_2_NC_TRACE_SILK]  113.08,26.67 0 bottom
LED-PWR3  JUMPER-SMT_2_NC_TRACE_SILK  [SMT-JUMPER_2_NC_TRACE_SILK]  14.12,112.22 180 bottom
LED-PWR4  JUMPER-SMT_2_NC_TRACE_SILK  [SMT-JUMPER_2_NC_TRACE_SILK]  52.12,112.22 180 bottom
LED-PWR5  JUMPER-SMT_2_NC_TRACE_SILK  [SMT-JUMPER_2_NC_TRACE_SILK]  90.12,112.22 180 bottom
LED_0  Green  [LED-0603]  39.62,63.08 90 top
LED_1  Yellow  [LED-0603]  37.08,63.08 90 top
LED_2  Green  [LED-0603]  77.62,63.08 90 top
LED_3  Yellow  [LED-0603]  75.08,63.08 90 top
LED_4  Green  [LED-0603]  115.62,63.08 90 top
LED_5  Yellow  [LED-0603]  113.08,63.08 90 top
LED_6  Green  [LED-0603]  11.58,75.81 270 top
LED_7  Yellow  [LED-0603]  14.12,75.81 270 top
LED_8  Green  [LED-0603]  49.58,75.81 270 top
LED_9  Yellow  [LED-0603]  52.12,75.81 270 top
LED_10  Green  [LED-0603]  87.58,75.81 270 top
LED_11  Yellow  [LED-0603]  90.12,75.81 270 top
LINK_ST  Blue  [LED-0603]  34.54,63.08 90 top
LINK_ST1  Blue  [LED-0603]  72.54,63.08 90 top
LINK_ST2  Blue  [LED-0603]  110.54,63.08 90 top
LINK_ST3  Blue  [LED-0603]  16.66,75.81 270 top
LINK_ST4  Blue  [LED-0603]  54.66,75.81 270 top
LINK_ST5  Blue  [LED-0603]  92.66,75.81 270 top
LOGO1  SFE_LOGO_NAME_FLAME.1_INCH  [SFE_LOGO_NAME_FLAME_.1]  37.59,58.04 0 bottom
LOGO2  OSHW-LOGOMINI  [OSHW-LOGO-MINI]  77.18,6.48 0 top
LOGO3  OSHW-LOGOMINI  [OSHW-LOGO-MINI]  39.18,6.48 0 top
LOGO4  SFE_LOGO_NAME_FLAME.1_INCH  [SFE_LOGO_NAME_FLAME_.1]  75.59,58.04 0 bottom
LOGO5  OSHW-LOGOMINI  [OSHW-LOGO-MINI]  115.18,6.48 0 top
LOGO6  SFE_LOGO_NAME_FLAME.1_INCH  [SFE_LOGO_NAME_FLAME_.1]  113.59,58.04 0 bottom
LOGO7  OSHW-LOGOMINI  [OSHW-LOGO-MINI]  12.03,132.41 180 top
LOGO8  SFE_LOGO_NAME_FLAME.1_INCH  [SFE_LOGO_NAME_FLAME_.1]  13.61,80.85 180 bottom
LOGO9  OSHW-LOGOMINI  [OSHW-LOGO-MINI]  50.02,132.41 180 top
LOGO10  SFE_LOGO_NAME_FLAME.1_INCH  [SFE_LOGO_NAME_FLAME_.1]  51.61,80.85 180 bottom
LOGO11  OSHW-LOGOMINI  [OSHW-LOGO-MINI]  88.02,132.41 180 top
LOGO12  SFE_LOGO_NAME_FLAME.1_INCH  [SFE_LOGO_NAME_FLAME_.1]  89.61,80.85 180 bottom
MEAS  JUMPER-COMBO_2_NC_TRACE  [COMBO-JUMPER_2_NC_TRACE]  9.57,14.22 90 bottom
MEAS1  JUMPER-COMBO_2_NC_TRACE  [COMBO-JUMPER_2_NC_TRACE]  47.57,14.22 90 bottom
MEAS2  JUMPER-COMBO_2_NC_TRACE  [COMBO-JUMPER_2_NC_TRACE]  85.57,14.22 90 bottom
MEAS3  JUMPER-COMBO_2_NC_TRACE  [COMBO-JUMPER_2_NC_TRACE]  41.63,124.67 270 bottom
MEAS4  JUMPER-COMBO_2_NC_TRACE  [COMBO-JUMPER_2_NC_TRACE]  79.63,124.67 270 bottom
MEAS5  JUMPER-COMBO_2_NC_TRACE  [COMBO-JUMPER_2_NC_TRACE]  117.63,124.67 270 bottom
MS_SEL  [SMT-JUMPER_2_NO_SILK]  14.22,20.32 0 bottom
MS_SEL1  [SMT-JUMPER_2_NO_SILK]  52.22,20.32 0 bottom
MS_SEL2  [SMT-JUMPER_2_NO_SILK]  90.22,20.32 0 bottom
MS_SEL3  [SMT-JUMPER_2_NO_SILK]  36.98,118.57 180 bottom
MS_SEL4  [SMT-JUMPER_2_NO_SILK]  74.98,118.57 180 bottom
MS_SEL5  [SMT-JUMPER_2_NO_SILK]  112.98,118.57 180 bottom
PWR  Red  [LED-0603]  42.16,63.08 90 top
PWR1  Red  [LED-0603]  80.16,63.08 90 top
PWR2  Red  [LED-0603]  118.16,63.08 90 top
PWR3  Red  [LED-0603]  9.04,75.81 270 top
PWR4  Red  [LED-0603]  47.04,75.81 270 top
PWR5  Red  [LED-0603]  85.04,75.81 270 top
Q1  220mA/50V/3.5Ω  [SOT23-3]  19.07,8.2 90 top
Q2  20V/4.2A/52mΩ/1.4W  [SOT23-3]  13.82,8.12 270 top
Q3  20V/4.2A/52mΩ/1.4W  [SOT23-3]  51.81,8.12 270 top
Q4  220mA/50V/3.5Ω  [SOT23-3]  57.07,8.2 90 top
Q5  20V/4.2A/52mΩ/1.4W  [SOT23-3]  89.81,8.12 270 top
Q6  220mA/50V/3.5Ω  [SOT23-3]  95.07,8.2 90 top
Q7  20V/4.2A/52mΩ/1.4W  [SOT23-3]  37.39,130.77 90 top
Q8  220mA/50V/3.5Ω  [SOT23-3]  32.14,130.69 270 top
Q9  20V/4.2A/52mΩ/1.4W  [SOT23-3]  75.39,130.77 90 top
Q10  220mA/50V/3.5Ω  [SOT23-3]  70.14,130.69 270 top
Q11  20V/4.2A/52mΩ/1.4W  [SOT23-3]  113.39,130.77 90 top
Q12  220mA/50V/3.5Ω  [SOT23-3]  108.13,130.69 270 top
R1  49.9  [0603]  24.81,41.6 270 top
R2  49.9  [0603]  30.04,39.28 180 top
R3  5.1k  [0402-TIGHT]  26.18,41.6 90 top
R4  5.1k  [0402-TIGHT]  30.1,40.46 180 top
R5  10.2k  [0402-TIGHT]  27.42,39.31 0 top
R6  10.2k  [0402-TIGHT]  26.89,38.39 0 top
R7  10k  [0603]  10.69,8.06 270 top
R8  10k  [0603]  30.14,12.27 0 top
R9  1k  [0402-TIGHT]  39.62,26.67 180 top
R10  1.5k  [0603]  19.38,32.2 180 top
R11  1k  [0402-TIGHT]  39.62,50.8 90 top
R12  4.7k  [0402-TIGHT]  10.41,25.4 180 top
R13  4.7k  [0402-TIGHT]  10.41,24.13 180 top
R14  4.7k  [0402-TIGHT]  10.41,22.86 180 top
R15  4.7k  [0402-TIGHT]  10.41,21.59 180 top
R16  4.7k  [0402-TIGHT]  30.73,17.78 180 top
R17  4.7k  [0402-TIGHT]  39.62,29.21 0 top
R18  4.7k  [0402-TIGHT]  39.62,34.29 0 top
R19  4.7k  [0402-TIGHT]  39.62,31.75 0 top
R20  1k  [0402-TIGHT]  37.08,50.8 90 top
R21  1k  [0402-TIGHT]  35.81,50.8 90 top
R22  10k  [0603]  19.06,5.4 0 top
R23  100Ω  [0603]  23.13,48.6 90 top
R24  1.5k  [0603]  14.22,34.29 180 top
R25  4.7k  [0402-TIGHT]  18.8,30.86 180 top
R26  100  [0603]  16.26,8.13 270 top
R27  4.7k  [0603]  33.27,45.72 90 top
R28  100k  [0402-TIGHT]  32,45.72 270 top
R29  100Ω  [0603]  22.3,6.04 90 top
R30  10k  [0603]  57.06,5.4 0 top
R31  10k  [0603]  48.68,8.06 270 top
R32  10k  [0603]  68.14,12.27 0 top
R33  1k  [0402-TIGHT]  77.62,26.67 180 top
R34  49.9  [0603]  68.04,39.28 180 top
R35  49.9  [0603]  62.81,41.6 270 top
R36  1.5k  [0603]  57.38,32.2 180 top
R37  1k  [0402-TIGHT]  77.62,50.8 90 top
R38  4.7k  [0402-TIGHT]  48.41,25.4 180 top
R39  4.7k  [0402-TIGHT]  48.41,24.13 180 top
R40  4.7k  [0402-TIGHT]  48.41,22.86 180 top
R41  4.7k  [0402-TIGHT]  48.41,21.59 180 top
R42  4.7k  [0402-TIGHT]  68.73,17.78 180 top
R43  4.7k  [0402-TIGHT]  77.62,29.21 0 top
R44  1k  [0402-TIGHT]  75.08,50.8 90 top
R45  4.7k  [0402-TIGHT]  77.62,34.29 0 top
R46  1k  [0402-TIGHT]  73.81,50.8 90 top
R47  4.7k  [0402-TIGHT]  77.62,31.75 0 top
R48  10.2k  [0402-TIGHT]  65.42,39.31 0 top
R49  10.2k  [0402-TIGHT]  64.89,38.39 0 top
R50  5.1k  [0402-TIGHT]  68.1,40.46 180 top
R51  5.1k  [0402-TIGHT]  64.18,41.6 90 top
R52  100Ω  [0603]  61.13,48.6 90 top
R53  1.5k  [0603]  52.22,34.29 180 top
R54  4.7k  [0402-TIGHT]  56.79,30.86 180 top
R55  100  [0603]  54.25,8.13 270 top
R56  4.7k  [0603]  71.27,45.72 90 top
R57  100k  [0402-TIGHT]  70,45.72 270 top
R58  100Ω  [0603]  60.29,6.04 90 top
R59  10k  [0603]  95.06,5.4 0 top
R60  10k  [0603]  86.68,8.06 270 top
R61  10k  [0603]  106.14,12.27 0 top
R62  1k  [0402-TIGHT]  115.62,26.67 180 top
R63  49.9  [0603]  106.03,39.28 180 top
R64  49.9  [0603]  100.81,41.6 270 top
R65  1.5k  [0603]  95.38,32.2 180 top
R66  1k  [0402-TIGHT]  115.62,50.8 90 top
R67  4.7k  [0402-TIGHT]  86.41,25.4 180 top
R68  4.7k  [0402-TIGHT]  86.41,24.13 180 top
R69  4.7k  [0402-TIGHT]  86.41,22.86 180 top
R70  4.7k  [0402-TIGHT]  86.41,21.59 180 top
R71  4.7k  [0402-TIGHT]  106.73,17.78 180 top
R72  4.7k  [0402-TIGHT]  115.62,29.21 0 top
R73  1k  [0402-TIGHT]  113.08,50.8 90 top
R74  4.7k  [0402-TIGHT]  115.62,34.29 0 top
R75  1k  [0402-TIGHT]  111.81,50.8 90 top
R76  4.7k  [0402-TIGHT]  115.62,31.75 0 top
R77  10.2k  [0402-TIGHT]  103.41,39.31 0 top
R78  10.2k  [0402-TIGHT]  102.89,38.39 0 top
R79  5.1k  [0402-TIGHT]  106.1,40.46 180 top
R80  5.1k  [0402-TIGHT]  102.17,41.6 90 top
R81  100Ω  [0603]  99.12,48.6 90 top
R82  1.5k  [0603]  90.22,34.29 180 top
R83  4.7k  [0402-TIGHT]  94.79,30.86 180 top
R84  100  [0603]  92.25,8.13 270 top
R85  4.7k  [0603]  109.27,45.72 90 top
R86  100k  [0402-TIGHT]  108,45.72 270 top
R87  100Ω  [0603]  98.29,6.04 90 top
R88  10k  [0603]  32.14,133.49 180 top
R89  10k  [0603]  40.52,130.82 90 top
R90  10k  [0603]  21.06,126.62 180 top
R91  1k  [0402-TIGHT]  11.58,112.22 0 top
R92  49.9  [0603]  21.17,99.61 0 top
R93  49.9  [0603]  26.4,97.29 90 top
R94  1.5k  [0603]  31.83,106.69 0 top
R95  1k  [0402-TIGHT]  11.58,88.09 270 top
R96  4.7k  [0402-TIGHT]  40.79,113.49 0 top
R97  4.7k  [0402-TIGHT]  40.79,114.76 0 top
R98  4.7k  [0402-TIGHT]  40.79,116.03 0 top
R99  4.7k  [0402-TIGHT]  40.79,117.3 0 top
R100  4.7k  [0402-TIGHT]  20.47,121.11 0 top
R101  4.7k  [0402-TIGHT]  11.58,109.68 180 top
R102  1k  [0402-TIGHT]  14.12,88.09 270 top
R103  4.7k  [0402-TIGHT]  11.58,104.6 180 top
R104  1k  [0402-TIGHT]  15.39,88.09 270 top
R105  4.7k  [0402-TIGHT]  11.58,107.14 180 top
R106  10.2k  [0402-TIGHT]  23.79,99.58 180 top
R107  10.2k  [0402-TIGHT]  24.31,100.5 180 top
R108  5.1k  [0402-TIGHT]  21.1,98.43 0 top
R109  5.1k  [0402-TIGHT]  25.03,97.29 270 top
R110  100Ω  [0603]  28.08,90.29 270 top
R111  1.5k  [0603]  36.98,104.6 0 top
R112  4.7k  [0402-TIGHT]  32.41,108.03 0 top
R113  100  [0603]  34.95,130.76 90 top
R114  4.7k  [0603]  17.93,93.17 270 top
R115  100k  [0402-TIGHT]  19.2,93.17 90 top
R116  100Ω  [0603]  28.91,132.85 270 top
R117  10k  [0603]  70.14,133.49 180 top
R118  10k  [0603]  78.52,130.82 90 top
R119  10k  [0603]  59.06,126.62 180 top
R120  1k  [0402-TIGHT]  49.58,112.22 0 top
R121  49.9  [0603]  59.17,99.61 0 top
R122  49.9  [0603]  64.39,97.29 90 top
R123  1.5k  [0603]  69.82,106.69 0 top
R124  1k  [0402-TIGHT]  49.58,88.09 270 top
R125  4.7k  [0402-TIGHT]  78.79,113.49 0 top
R126  4.7k  [0402-TIGHT]  78.79,114.76 0 top
R127  4.7k  [0402-TIGHT]  78.79,116.03 0 top
R128  4.7k  [0402-TIGHT]  78.79,117.3 0 top
R129  4.7k  [0402-TIGHT]  58.47,121.11 0 top
R130  4.7k  [0402-TIGHT]  49.58,109.68 180 top
R131  1k  [0402-TIGHT]  52.12,88.09 270 top
R132  4.7k  [0402-TIGHT]  49.58,104.6 180 top
R133  1k  [0402-TIGHT]  53.39,88.09 270 top
R134  4.7k  [0402-TIGHT]  49.58,107.14 180 top
R135  10.2k  [0402-TIGHT]  61.79,99.58 180 top
R136  10.2k  [0402-TIGHT]  62.31,100.5 180 top
R137  5.1k  [0402-TIGHT]  59.1,98.43 0 top
R138  5.1k  [0402-TIGHT]  63.03,97.29 270 top
R139  100Ω  [0603]  66.08,90.29 270 top
R140  1.5k  [0603]  74.98,104.6 0 top
R141  4.7k  [0402-TIGHT]  70.41,108.03 0 top
R142  100  [0603]  72.95,130.76 90 top
R143  4.7k  [0603]  55.93,93.17 270 top
R144  100k  [0402-TIGHT]  57.2,93.17 90 top
R145  100Ω  [0603]  66.91,132.85 270 top
R146  10k  [0603]  108.14,133.49 180 top
R147  10k  [0603]  116.52,130.82 90 top
R148  10k  [0603]  97.06,126.62 180 top
R149  1k  [0402-TIGHT]  87.58,112.22 0 top
R150  49.9  [0603]  97.17,99.61 0 top
R151  49.9  [0603]  102.39,97.29 90 top
R152  1.5k  [0603]  107.82,106.69 0 top
R153  1k  [0402-TIGHT]  87.58,88.09 270 top
R154  4.7k  [0402-TIGHT]  116.79,113.49 0 top
R155  4.7k  [0402-TIGHT]  116.79,114.76 0 top
R156  4.7k  [0402-TIGHT]  116.79,116.03 0 top
R157  4.7k  [0402-TIGHT]  116.79,117.3 0 top
R158  4.7k  [0402-TIGHT]  96.47,121.11 0 top
R159  4.7k  [0402-TIGHT]  87.58,109.68 180 top
R160  1k  [0402-TIGHT]  90.12,88.09 270 top
R161  4.7k  [0402-TIGHT]  87.58,104.6 180 top
R162  1k  [0402-TIGHT]  91.39,88.09 270 top
R163  4.7k  [0402-TIGHT]  87.58,107.14 180 top
R164  10.2k  [0402-TIGHT]  99.79,99.58 180 top
R165  10.2k  [0402-TIGHT]  100.31,100.5 180 top
R166  5.1k  [0402-TIGHT]  97.1,98.43 0 top
R167  5.1k  [0402-TIGHT]  101.03,97.29 270 top
R168  100Ω  [0603]  104.08,90.29 270 top
R169  1.5k  [0603]  112.98,104.6 0 top
R170  4.7k  [0402-TIGHT]  108.41,108.03 0 top
R171  100  [0603]  110.95,130.76 90 top
R172  4.7k  [0603]  93.93,93.17 270 top
R173  100k  [0402-TIGHT]  95.2,93.17 90 top
R174  100Ω  [0603]  104.91,132.85 270 top
S1  RESET  [TACTILE_SWITCH_SMD_5.2MM]  38.48,43.94 270 top
S2  RESET  [TACTILE_SWITCH_SMD_5.2MM]  76.48,43.94 270 top
S3  RESET  [TACTILE_SWITCH_SMD_5.2MM]  114.48,43.94 270 top
S4  RESET  [TACTILE_SWITCH_SMD_5.2MM]  12.73,94.95 90 top
S5  RESET  [TACTILE_SWITCH_SMD_5.2MM]  50.72,94.95 90 top
S6  RESET  [TACTILE_SWITCH_SMD_5.2MM]  88.72,94.95 90 top
SHLD  [SMT-JUMPER_3_1-NC_TRACE_SILK]  10.1,53.5 90 bottom
SHLD1  [SMT-JUMPER_3_1-NC_TRACE_SILK]  48.1,53.5 90 bottom
SHLD2  [SMT-JUMPER_3_1-NC_TRACE_SILK]  86.1,53.5 90 bottom
SHLD3  [SMT-JUMPER_3_1-NC_TRACE_SILK]  41.1,85.39 270 bottom
SHLD4  [SMT-JUMPER_3_1-NC_TRACE_SILK]  79.1,85.39 270 bottom
SHLD5  [SMT-JUMPER_3_1-NC_TRACE_SILK]  117.1,85.39 270 bottom
SPI  TEST-POINTTP_15TH_THRU  [TP_15TH]  34.63,27.92 0 top
SPI1  TEST-POINTTP_15TH_THRU  [TP_15TH]  72.63,27.92 0 top
SPI2  TEST-POINTTP_15TH_THRU  [TP_15TH]  110.63,27.92 0 top
SPI3  TEST-POINTTP_15TH_THRU  [TP_15TH]  16.58,110.97 180 top
SPI4  TEST-POINTTP_15TH_THRU  [TP_15TH]  54.57,110.97 180 top
SPI5  TEST-POINTTP_15TH_THRU  [TP_15TH]  92.57,110.97 180 top
SPI_CFG0  [SMT-JUMPER_2_NO_SILK]  32.77,17.53 0 bottom
SPI_CFG1  [SMT-JUMPER_2_NO_SILK]  14.22,17.78 0 bottom
SPI_CFG2  [SMT-JUMPER_2_NO_SILK]  52.22,17.78 0 bottom
SPI_CFG3  [SMT-JUMPER_2_NO_SILK]  70.76,17.53 0 bottom
SPI_CFG4  [SMT-JUMPER_2_NO_SILK]  90.22,17.78 0 bottom
SPI_CFG5  [SMT-JUMPER_2_NO_SILK]  108.76,17.53 0 bottom
SPI_CFG6  [SMT-JUMPER_2_NO_SILK]  36.98,121.11 180 bottom
SPI_CFG7  [SMT-JUMPER_2_NO_SILK]  18.44,121.36 180 bottom
SPI_CFG8  [SMT-JUMPER_2_NO_SILK]  74.98,121.11 180 bottom
SPI_CFG9  [SMT-JUMPER_2_NO_SILK]  56.44,121.36 180 bottom
SPI_CFG10  [SMT-JUMPER_2_NO_SILK]  112.98,121.11 180 bottom
SPI_CFG11  [SMT-JUMPER_2_NO_SILK]  94.44,121.36 180 bottom
SWPD  [SMT-JUMPER_2_NO_SILK]  14.22,22.86 0 bottom
SWPD1  [SMT-JUMPER_2_NO_SILK]  52.22,22.86 0 bottom
SWPD2  [SMT-JUMPER_2_NO_SILK]  90.22,22.86 0 bottom
SWPD3  [SMT-JUMPER_2_NO_SILK]  36.98,116.03 180 bottom
SWPD4  [SMT-JUMPER_2_NO_SILK]  74.98,116.03 180 bottom
SWPD5  [SMT-JUMPER_2_NO_SILK]  112.98,116.03 180 bottom
T1  WE-STST  [WE_STST_TRANSFORMER_1:1_SMD_3.2X4.7MM_74930030]  26.7,49.84 90 top
T2  WE-STST  [WE_STST_TRANSFORMER_1:1_SMD_3.2X4.7MM_74930030]  64.7,49.84 90 top
T3  WE-STST  [WE_STST_TRANSFORMER_1:1_SMD_3.2X4.7MM_74930030]  102.7,49.84 90 top
T4  WE-STST  [WE_STST_TRANSFORMER_1:1_SMD_3.2X4.7MM_74930030]  24.5,89.05 270 top
T5  WE-STST  [WE_STST_TRANSFORMER_1:1_SMD_3.2X4.7MM_74930030]  62.5,89.05 270 top
T6  WE-STST  [WE_STST_TRANSFORMER_1:1_SMD_3.2X4.7MM_74930030]  100.5,89.05 270 top
TP1  TEST-POINT3X4  [PAD.03X.04]  39.6,15 0 bottom
TP2  TEST-POINT3X4  [PAD.03X.04]  77.6,15 0 bottom
TP3  TEST-POINT3X4  [PAD.03X.04]  115.6,15 0 bottom
TP4  TEST-POINT3X4  [PAD.03X.04]  11.6,123.89 180 bottom
TP5  TEST-POINT3X4  [PAD.03X.04]  49.6,123.89 180 bottom
TP6  TEST-POINT3X4  [PAD.03X.04]  87.6,123.89 180 bottom
TX2P1  [SMT-JUMPER_2_NO_SILK]  52.22,25.4 0 bottom
TX2P2  [SMT-JUMPER_2_NO_SILK]  90.22,25.4 0 bottom
TX2P3  [SMT-JUMPER_2_NO_SILK]  36.98,113.49 180 bottom
TX2P4  [SMT-JUMPER_2_NO_SILK]  14.22,25.4 0 bottom
TX2P5  [SMT-JUMPER_2_NO_SILK]  74.98,113.49 180 bottom
TX2P6  [SMT-JUMPER_2_NO_SILK]  112.98,113.49 180 bottom
U1  ADIN1110  [LFCSP-40]  25.65,33.78 180 top
U2  EEPROM  [SO08]  28.14,8.27 270 top
U3  3.3V  [SOT23-5]  17.16,13.53 270 top
U4  WE-TVS  [WE_TVS_1.0X1.2MM]  27.91,42.37 0 top
U5  EEPROM  [SO08]  66.14,8.27 270 top
U6  3.3V  [SOT23-5]  55.16,13.53 270 top
U7  ADIN1110  [LFCSP-40]  63.65,33.78 180 top
U8  WE-TVS  [WE_TVS_1.0X1.2MM]  65.91,42.37 0 top
U9  EEPROM  [SO08]  104.14,8.27 270 top
U10  3.3V  [SOT23-5]  93.16,13.53 270 top
U11  ADIN1110  [LFCSP-40]  101.65,33.78 180 top
U12  WE-TVS  [WE_TVS_1.0X1.2MM]  103.9,42.37 0 top
U13  EEPROM  [SO08]  23.06,130.62 90 top
U14  3.3V  [SOT23-5]  34.05,125.36 90 top
U15  ADIN1110  [LFCSP-40]  25.55,105.11 0 top
U16  WE-TVS  [WE_TVS_1.0X1.2MM]  23.3,96.51 180 top
U17  EEPROM  [SO08]  61.06,130.62 90 top
U18  3.3V  [SOT23-5]  72.05,125.36 90 top
U19  ADIN1110  [LFCSP-40]  63.55,105.11 0 top
U20  WE-TVS  [WE_TVS_1.0X1.2MM]  61.3,96.51 180 top
U21  EEPROM  [SO08]  99.06,130.62 90 top
U22  3.3V  [SOT23-5]  110.04,125.36 90 top
U23  ADIN1110  [LFCSP-40]  101.55,105.11 0 top
U24  WE-TVS  [WE_TVS_1.0X1.2MM]  99.3,96.51 180 top
U$1  [#RESET#0]  35.31,44.07 90 top
U$2  HARTING_LOGO  [HARTING_LOGO_9MM]  36.2,19.81 0 top
U$3  [MICROMOD_LOGO_.35]  50.75,63.04 0 top
U$4  [ADIN11100]  25.39,24.79 0 top
U$5  DIGIKEY_LOGO  [DIGIKEY_LOGO]  16.13,43.94 0 top
U$6  [#PWR#19]  40.23,26.7 0 bottom
U$7  [PWR0]  42.13,59.85 90 top
U$8  [SHLD11]  8.35,53.45 270 bottom
U$9  [#EWP#18]  28.07,14.22 0 bottom
U$10  [#LED0#20]  40.44,29.19 0 bottom
U$11  [#GND#16]  10.05,49.95 270 bottom
U$12  [#CAP#17]  10.15,57.1 270 bottom
U$13  [##TX2P4_EN##4]  19.28,25.35 0 bottom
U$14  [#SPI_CFG1#0]  18.8,17.78 0 bottom
U$15  [#MS_SEL#2]  18.29,20.32 0 bottom
U$16  [#SPI_CFG0#0]  37.46,17.53 0 bottom
U$17  [SINGLE_PAIR_ETHERNET0]  25.91,26.8 0 top
U$18  [SINGLE_PAIR_ETHERNET0]  25.4,49.53 0 bottom
U$19  WURTH_LOGO  [WURTH_LOGO_9MM]  19.18,19.94 0 top
U$20  [ANALOG_DEVICE_LOGO_9MM]  33.02,41.53 0 bottom
U$21  [ADIN11100]  25.91,47.27 0 bottom
U$22  [##SWPD_EN##4]  18.96,22.86 0 bottom
U$23  [LED_03]  39.62,59.52 90 top
U$24  [FUNCTION0]  13.28,60.96 0 bottom
U$25  [LED_14]  37.08,59.65 90 top
U$26  [FUNCTION0]  13.01,61.09 0 top
U$27  [LINK_ST15]  34.54,58.89 90 top
U$28  [#MEAS#3]  7.82,16.99 270 bottom
U$29  [#LED1#21]  40.31,34.31 0 bottom
U$30  [HARTING_LOGO_9MM]  17.65,9.27 0 bottom
U$31  [#LINKST#2]  40.77,31.75 0 bottom
U$32  [WURTH_LOGO_9MM]  32.38,9.14 0 bottom
U$33  ANALOG_DEVICES_LOGO  [ANALOG_DEVICE_LOGO_9MM]  38.48,11.43 0 top
U$34  [DIGIKEY_LOGO]  18.92,41.91 0 bottom
U$35  [SFE_LOGO_NAME_FLAME_.1]  13.34,55.75 0 top
U$36  [MICROMOD_LOGO_.35]  51.43,62.97 0 bottom
U$37  [MICROMOD_LOGO_.35]  13.43,62.97 0 bottom
U$38  [#MEAS#3]  45.82,16.99 270 bottom
U$39  [PWR0]  80.13,59.85 90 top
U$40  [FUNCTION0]  51.01,61.09 0 top
U$41  [ADIN11100]  63.39,24.79 0 top
U$42  [#RESET#0]  73.3,44.07 90 top
U$43  [SHLD11]  46.35,53.45 270 bottom
U$44  [#SPI_CFG1#0]  56.79,17.78 0 bottom
U$45  [#MS_SEL#2]  56.29,20.32 0 bottom
U$46  [#SPI_CFG0#0]  75.46,17.53 0 bottom
U$47  [ADIN11100]  63.9,47.27 0 bottom
U$48  [FUNCTION0]  51.28,60.96 0 bottom
U$49  [LED_03]  77.62,59.52 90 top
U$50  [LED_14]  75.08,59.65 90 top
U$51  [LINK_ST15]  72.54,58.89 90 top
U$52  [#GND#16]  48.05,49.95 270 bottom
U$53  [#CAP#17]  48.15,57.1 270 bottom
U$54  [#EWP#18]  66.07,14.22 0 bottom
U$55  [#PWR#19]  78.23,26.7 0 bottom
U$56  [#LED0#20]  78.44,29.19 0 bottom
U$57  [#LED1#21]  78.31,34.31 0 bottom
U$58  [#LINKST#2]  78.76,31.75 0 bottom
U$59  [##TX2P4_EN##4]  57.27,25.35 0 bottom
U$60  [##SWPD_EN##4]  56.95,22.86 0 bottom
U$61  [SINGLE_PAIR_ETHERNET0]  63.91,26.8 0 top
U$62  [SINGLE_PAIR_ETHERNET0]  63.4,49.53 0 bottom
U$63  [MICROMOD_LOGO_.35]  12.76,63.04 0 top
U$64  [ANALOG_DEVICE_LOGO_9MM]  71.02,41.53 0 bottom
U$65  [HARTING_LOGO_9MM]  55.65,9.27 0 bottom
U$66  [WURTH_LOGO_9MM]  70.38,9.14 0 bottom
U$67  [DIGIKEY_LOGO]  56.92,41.91 0 bottom
U$68  [SFE_LOGO_NAME_FLAME_.1]  51.33,55.75 0 top
U$69  DIGIKEY_LOGO  [DIGIKEY_LOGO]  54.13,43.94 0 top
U$70  ANALOG_DEVICES_LOGO  [ANALOG_DEVICE_LOGO_9MM]  76.48,11.43 0 top
U$71  HARTING_LOGO  [HARTING_LOGO_9MM]  74.19,19.81 0 top
U$72  WURTH_LOGO  [WURTH_LOGO_9MM]  57.18,19.94 0 top
U$73  [MICROMOD_LOGO_.35]  88.75,63.04 0 top
U$74  [MICROMOD_LOGO_.35]  89.42,62.97 0 bottom
U$75  [#MEAS#3]  83.82,16.99 270 bottom
U$76  [PWR0]  118.13,59.85 90 top
U$77  [FUNCTION0]  89.01,61.09 0 top
U$78  [ADIN11100]  101.39,24.79 0 top
U$79  [#RESET#0]  111.3,44.07 90 top
U$80  [SHLD11]  84.35,53.45 270 bottom
U$81  [#SPI_CFG1#0]  94.79,17.78 0 bottom
U$82  [#MS_SEL#2]  94.28,20.32 0 bottom
U$83  [#SPI_CFG0#0]  113.46,17.53 0 bottom
U$84  [ADIN11100]  101.9,47.27 0 bottom
U$85  [FUNCTION0]  89.28,60.96 0 bottom
U$86  [LED_03]  115.62,59.52 90 top
U$87  [LED_14]  113.08,59.65 90 top
U$88  [LINK_ST15]  110.54,58.89 90 top
U$89  [#GND#16]  86.05,49.95 270 bottom
U$90  [#CAP#17]  86.15,57.1 270 bottom
U$91  [#EWP#18]  104.06,14.22 0 bottom
U$92  [#PWR#19]  116.23,26.7 0 bottom
U$93  [#LED0#20]  116.44,29.19 0 bottom
U$94  [#LED1#21]  116.31,34.31 0 bottom
U$95  [#LINKST#2]  116.76,31.75 0 bottom
U$96  [##TX2P4_EN##4]  95.27,25.35 0 bottom
U$97  [##SWPD_EN##4]  94.95,22.86 0 bottom
U$98  [SINGLE_PAIR_ETHERNET0]  101.9,26.8 0 top
U$99  [SINGLE_PAIR_ETHERNET0]  101.4,49.53 0 bottom
U$100  [ANALOG_DEVICE_LOGO_9MM]  109.02,41.53 0 bottom
U$101  [HARTING_LOGO_9MM]  93.65,9.27 0 bottom
U$102  [WURTH_LOGO_9MM]  108.38,9.14 0 bottom
U$103  [DIGIKEY_LOGO]  94.92,41.91 0 bottom
U$104  [SFE_LOGO_NAME_FLAME_.1]  89.33,55.75 0 top
U$105  DIGIKEY_LOGO  [DIGIKEY_LOGO]  92.13,43.94 0 top
U$106  ANALOG_DEVICES_LOGO  [ANALOG_DEVICE_LOGO_9MM]  114.48,11.43 0 top
U$107  HARTING_LOGO  [HARTING_LOGO_9MM]  112.19,19.81 0 top
U$108  WURTH_LOGO  [WURTH_LOGO_9MM]  95.17,19.94 0 top
U$109  [MICROMOD_LOGO_.35]  38.45,75.85 180 top
U$110  [MICROMOD_LOGO_.35]  37.78,75.92 180 bottom
U$111  [#MEAS#3]  43.39,121.9 90 bottom
U$112  [PWR0]  9.07,79.04 270 top
U$113  [FUNCTION0]  38.2,77.8 180 top
U$114  [ADIN11100]  25.81,114.1 180 top
U$115  [#RESET#0]  15.9,94.82 270 top
U$116  [SHLD11]  42.85,85.44 90 bottom
U$117  [#SPI_CFG1#0]  32.41,121.11 180 bottom
U$118  [#MS_SEL#2]  32.92,118.57 180 bottom
U$119  [#SPI_CFG0#0]  13.74,121.36 180 bottom
U$120  [ADIN11100]  25.3,91.61 180 bottom
U$121  [FUNCTION0]  37.93,77.93 180 bottom
U$122  [LED_03]  11.58,79.37 270 top
U$123  [LED_14]  14.12,79.24 270 top
U$124  [LINK_ST15]  16.66,80 270 top
U$125  [#GND#16]  41.15,88.94 90 bottom
U$126  [#CAP#17]  41.05,81.79 90 bottom
U$127  [#EWP#18]  23.14,124.67 180 bottom
U$128  [#PWR#19]  10.97,112.19 180 bottom
U$129  [#LED0#20]  10.76,109.7 180 bottom
U$130  [#LED1#21]  10.89,104.58 180 bottom
U$131  [#LINKST#2]  10.44,107.14 180 bottom
U$132  [##TX2P4_EN##4]  31.93,113.54 180 bottom
U$133  [##SWPD_EN##4]  32.25,116.03 180 bottom
U$134  [SINGLE_PAIR_ETHERNET0]  25.3,112.09 180 top
U$135  [SINGLE_PAIR_ETHERNET0]  25.81,89.36 180 bottom
U$136  [ANALOG_DEVICE_LOGO_9MM]  18.19,97.36 180 bottom
U$137  [HARTING_LOGO_9MM]  33.55,129.62 180 bottom
U$138  [WURTH_LOGO_9MM]  18.82,129.75 180 bottom
U$139  [DIGIKEY_LOGO]  32.28,96.98 180 bottom
U$140  [SFE_LOGO_NAME_FLAME_.1]  37.87,83.14 180 top
U$141  DIGIKEY_LOGO  [DIGIKEY_LOGO]  35.08,94.95 180 top
U$142  ANALOG_DEVICES_LOGO  [ANALOG_DEVICE_LOGO_9MM]  12.73,127.46 180 top
U$143  HARTING_LOGO  [HARTING_LOGO_9MM]  15.01,119.08 180 top
U$144  WURTH_LOGO  [WURTH_LOGO_9MM]  32.03,118.95 180 top
U$145  [MICROMOD_LOGO_.35]  76.45,75.85 180 top
U$146  [MICROMOD_LOGO_.35]  75.78,75.92 180 bottom
U$147  [#MEAS#3]  81.39,121.9 90 bottom
U$148  [PWR0]  47.07,79.04 270 top
U$149  [FUNCTION0]  76.19,77.8 180 top
U$150  [ADIN11100]  63.81,114.1 180 top
U$151  [#RESET#0]  53.9,94.82 270 top
U$152  [SHLD11]  80.85,85.44 90 bottom
U$153  [#SPI_CFG1#0]  70.41,121.11 180 bottom
U$154  [#MS_SEL#2]  70.92,118.57 180 bottom
U$155  [#SPI_CFG0#0]  51.74,121.36 180 bottom
U$156  [ADIN11100]  63.3,91.61 180 bottom
U$157  [FUNCTION0]  75.93,77.93 180 bottom
U$158  [LED_03]  49.58,79.37 270 top
U$159  [LED_14]  52.12,79.24 270 top
U$160  [LINK_ST15]  54.66,80 270 top
U$161  [#GND#16]  79.15,88.94 90 bottom
U$162  [#CAP#17]  79.05,81.79 90 bottom
U$163  [#EWP#18]  61.14,124.67 180 bottom
U$164  [#PWR#19]  48.97,112.19 180 bottom
U$165  [#LED0#20]  48.76,109.7 180 bottom
U$166  [#LED1#21]  48.89,104.58 180 bottom
U$167  [#LINKST#2]  48.44,107.14 180 bottom
U$168  [##TX2P4_EN##4]  69.93,113.54 180 bottom
U$169  [##SWPD_EN##4]  70.25,116.03 180 bottom
U$170  [SINGLE_PAIR_ETHERNET0]  63.3,112.09 180 top
U$171  [SINGLE_PAIR_ETHERNET0]  63.8,89.36 180 bottom
U$172  [ANALOG_DEVICE_LOGO_9MM]  56.18,97.36 180 bottom
U$173  [HARTING_LOGO_9MM]  71.55,129.62 180 bottom
U$174  [WURTH_LOGO_9MM]  56.82,129.75 180 bottom
U$175  [DIGIKEY_LOGO]  70.28,96.98 180 bottom
U$176  [SFE_LOGO_NAME_FLAME_.1]  75.87,83.14 180 top
U$177  DIGIKEY_LOGO  [DIGIKEY_LOGO]  73.08,94.95 180 top
U$178  ANALOG_DEVICES_LOGO  [ANALOG_DEVICE_LOGO_9MM]  50.72,127.46 180 top
U$179  HARTING_LOGO  [HARTING_LOGO_9MM]  53.01,119.08 180 top
U$180  WURTH_LOGO  [WURTH_LOGO_9MM]  70.03,118.95 180 top
U$181  [MICROMOD_LOGO_.35]  114.45,75.85 180 top
U$182  [MICROMOD_LOGO_.35]  113.78,75.92 180 bottom
U$183  [#MEAS#3]  119.38,121.9 90 bottom
U$184  [PWR0]  85.07,79.04 270 top
U$185  [FUNCTION0]  114.19,77.8 180 top
U$186  [ADIN11100]  101.81,114.1 180 top
U$187  [#RESET#0]  91.9,94.82 270 top
U$188  [SHLD11]  118.85,85.44 90 bottom
U$189  [#SPI_CFG1#0]  108.41,121.11 180 bottom
U$190  [#MS_SEL#2]  108.92,118.57 180 bottom
U$191  [#SPI_CFG0#0]  89.74,121.36 180 bottom
U$192  [ADIN11100]  101.3,91.61 180 bottom
U$193  [FUNCTION0]  113.92,77.93 180 bottom
U$194  [LED_03]  87.58,79.37 270 top
U$195  [LED_14]  90.12,79.24 270 top
U$196  [LINK_ST15]  92.66,80 270 top
U$197  [#GND#16]  117.15,88.94 90 bottom
U$198  [#CAP#17]  117.05,81.79 90 bottom
U$199  [#EWP#18]  99.14,124.67 180 bottom
U$200  [#PWR#19]  86.97,112.19 180 bottom
U$201  [#LED0#20]  86.76,109.7 180 bottom
U$202  [#LED1#21]  86.89,104.58 180 bottom
U$203  [#LINKST#2]  86.44,107.14 180 bottom
U$204  [##TX2P4_EN##4]  107.93,113.54 180 bottom
U$205  [##SWPD_EN##4]  108.25,116.03 180 bottom
U$206  [SINGLE_PAIR_ETHERNET0]  101.3,112.09 180 top
U$207  [SINGLE_PAIR_ETHERNET0]  101.8,89.36 180 bottom
U$208  [ANALOG_DEVICE_LOGO_9MM]  94.18,97.36 180 bottom
U$209  [HARTING_LOGO_9MM]  109.55,129.62 180 bottom
U$210  [WURTH_LOGO_9MM]  94.82,129.75 180 bottom
U$211  [DIGIKEY_LOGO]  108.28,96.98 180 bottom
U$212  [SFE_LOGO_NAME_FLAME_.1]  113.87,83.14 180 top
U$213  DIGIKEY_LOGO  [DIGIKEY_LOGO]  111.07,94.95 180 top
U$214  ANALOG_DEVICES_LOGO  [ANALOG_DEVICE_LOGO_9MM]  88.72,127.46 180 top
U$215  HARTING_LOGO  [HARTING_LOGO_9MM]  91.01,119.08 180 top
U$216  WURTH_LOGO  [WURTH_LOGO_9MM]  108.03,118.95 180 top
Y1  25MHz  [CRYSTAL-SMD-2.0X1.6MM-WE]  33.14,35.63 90 top
Y2  25MHz  [CRYSTAL-SMD-2.0X1.6MM-WE]  71.14,35.63 90 top
Y3  25MHz  [CRYSTAL-SMD-2.0X1.6MM-WE]  109.14,35.63 90 top
Y4  25MHz  [CRYSTAL-SMD-2.0X1.6MM-WE]  18.06,103.26 270 top
Y5  25MHz  [CRYSTAL-SMD-2.0X1.6MM-WE]  56.06,103.26 270 top
Y6  25MHz  [CRYSTAL-SMD-2.0X1.6MM-WE]  94.06,103.26 270 top

## Library data of the parts
C1 C2 C40 C41 C63 C64 C86 C87 C109 C110 C132 C133 = SparkFun-Capacitors; PROD_ID: CAP-15456
C3 C4 C25 C26 C48 C49 C71 C72 C94 C95 C117 C118 = SparkFun-Capacitors; PROD_ID: CAP-16503
C5 C6 C27 C28 C50 C51 C73 C74 C96 C97 C119 C120 = SparkFun-Capacitors; PROD_ID: CAP-16506
C7 C42 C65 C88 C111 C134 = SparkFun-Capacitors; PROD_ID: CAP-16505
C8 C9 C24 C29 C47 C52 C70 C75 C93 C98 C116 C121 = SparkFun-Capacitors; PROD_ID: CAP-16504
C10 C13 C15 C16 C18 C23 C30 C33 C35 C36 C38 C46 C53 C56 C58 C59 C61 C69 C76 C79 C81 C82 C84 C92 C99 C102 C104 C105 C107 C115 C122 C125 C127 C128 C130 C138 = SparkFun-Capacitors; PROD_ID: CAP-16507
C11 C31 C54 C77 C100 C123 = SparkFun-Capacitors; PROD_ID: CAP-16639
C12 C14 C17 C32 C34 C37 C55 C57 C60 C78 C80 C83 C101 C103 C106 C124 C126 C129 = SparkFun-Capacitors; PROD_ID: CAP-16508
C19 C39 C62 C85 C108 C131 = SparkFun-Capacitors; PROD_ID: CAP-12417
C20 C43 C66 C89 C112 C135 = SparkFun-Capacitors; PROD_ID: CAP-16430
C21 C44 C67 C90 C113 C136 = SparkFun-Capacitors; PROD_ID: CAP-16523
C22 C45 C68 C91 C114 C137 = SparkFun-Capacitors; PROD_ID: CAP-16570; VALUE: 470nF
CIPO CIPO1-CIPO5 COPI COPI1-COPI5 CS CS1-CS5 INT INT1-INT5 SPI SPI1-SPI5 TP1-TP6 = SparkFun-Connectors
E$1-E$4 FD1-FD24 LOGO1-LOGO12 U$35 U$68 U$104 U$140 U$176 U$212 = SparkFun-Aesthetics
E$5 E$6 = SparkFun-Retired
EWP EWP1-EWP5 LED-0 LED-1-LED-11 LED-LINK LED-LINK1-LED-LINK5 LED-PWR LED-PWR1-LED-PWR5 MEAS MEAS1-MEAS5 MS_SEL MS_SEL1-MS_SEL5 SHLD SHLD1-SHLD5 SPI_CFG0 SPI_CFG1-SPI_CFG11 SWPD SWPD1-SWPD5 TX2P1-TX2P6 = SparkFun-Jumpers
J1 J4 J6 J8 J10 J12 = ADIN1110; PROD_ID: CONN-16501
J2 J3 J5 J7 J9 J11 U$3 U$36 U$37 U$63 U$73 U$74 U$109 U$110 U$145 U$146 U$181 U$182 = SparkFun-MicroMod
LED_0 LED_2 LED_4 LED_6 LED_8 LED_10 = SparkFun-LED; PROD_ID: DIO-16512
LED_1 LED_3 LED_5 LED_7 LED_9 LED_11 = SparkFun-LED; PROD_ID: DIO-16514
LINK_ST LINK_ST1-LINK_ST5 = SparkFun-LED; PROD_ID: DIO-16513
PWR PWR1-PWR5 = SparkFun-LED; PROD_ID: DIO-16511
Q1 Q4 Q6 Q8 Q10 Q12 = SparkFun-DiscreteSemi; PROD_ID: TRANS-00830
Q2 Q3 Q5 Q7 Q9 Q11 = SparkFun-DiscreteSemi; PROD_ID: TRANS-14388
R1 R2 R34 R35 R63 R64 R92 R93 R121 R122 R150 R151 = SparkFun-Resistors; PROD_ID: RES-16237
R3 R4 R50 R51 R79 R80 R108 R109 R137 R138 R166 R167 = SparkFun-Resistors; PROD_ID: RES-14340
R5 R6 R48 R49 R77 R78 R106 R107 R135 R136 R164 R165 = SparkFun-Resistors; PROD_ID: RES-16559
R7 R8 R22 R30-R32 R59-R61 R88-R90 R117-R119 R146-R148 = SparkFun-Resistors; PROD_ID: RES-00824
R9 R11 R20 R21 R33 R37 R44 R46 R62 R66 R73 R75 R91 R95 R102 R104 R120 R124 R131 R133 R149 R153 R160 R162 = SparkFun-Resistors; PROD_ID: RES-14342
R10 R24 R36 R53 R65 R82 R94 R111 R123 R140 R152 R169 = SparkFun-Resistors; PROD_ID: RES-08306
R12-R19 R25 R38-R43 R45 R47 R54 R67-R72 R74 R76 R83 R96-R101 R103 R105 R112 R125-R130 R132 R134 R141 R154-R159 R161 R163 R170 = SparkFun-Resistors; PROD_ID: RES-15343
R23 R52 R81 R110 R139 R168 = SparkFun-Resistors; PROD_ID: RES-07863; VALUE: 100
R26 R29 R55 R58 R84 R87 R113 R116 R142 R145 R171 R174 = SparkFun-Resistors; PROD_ID: RES-07863
R27 R56 R85 R114 R143 R172 = SparkFun-Resistors; PROD_ID: RES-07857
R28 R57 R86 R115 R144 R173 = SparkFun-Resistors; PROD_ID: RES-13495
S1-S6 = SparkFun-Switches; PROD_ID: SWCH-14139
T1-T6 = ADIN1110; PROD_ID: COMP-16426
U1 U7 U11 U15 U19 U23 = ADIN1110; PROD_ID: IC-16335
U2 U5 U9 U13 U17 U21 = SparkFun-IC-Memory; PROD_ID: IC-14645
U3 U6 U10 U14 U18 U22 = SparkFun-IC-Power; PROD_ID: VREG-12457
U4 U8 U12 U16 U20 U24 = ADIN1110; PROD_ID: DIO-16429
U$1 U$4 U$6-U$18 U$21-U$29 U$38-U$57 U$59-U$62 U$75-U$94 U$96-U$99 U$111-U$130 U$132-U$135 U$147-U$166 U$168-U$171 U$183-U$202 U$204-U$207 = output
U$2 U$5 U$19 U$20 U$30 U$32-U$34 U$64-U$67 U$69-U$72 U$100-U$103 U$105-U$108 U$136-U$139 U$141-U$144 U$172-U$175 U$177-U$180 U$208-U$211 U$213-U$216 = temp_logos
U$31 U$58 U$95 U$131 U$167 U$203 = ADIN1110
Y1-Y6 = SparkFun-Clocks; PROD_ID: XTAL-16515